# Altium PCB racer_pcb.PcbDoc (part 1 of 2)
Units mm, origin at the board's own origin, x right, y up, seen from the top; angles counter-clockwise.
Board outline 64 x 85 mm, 4 copper layers (Top Layer, Ground Plane, Power Plane, Bottom Layer), stack 0.844 mm thick; 108 components, 67 nets, 325 pads, 88 vias.
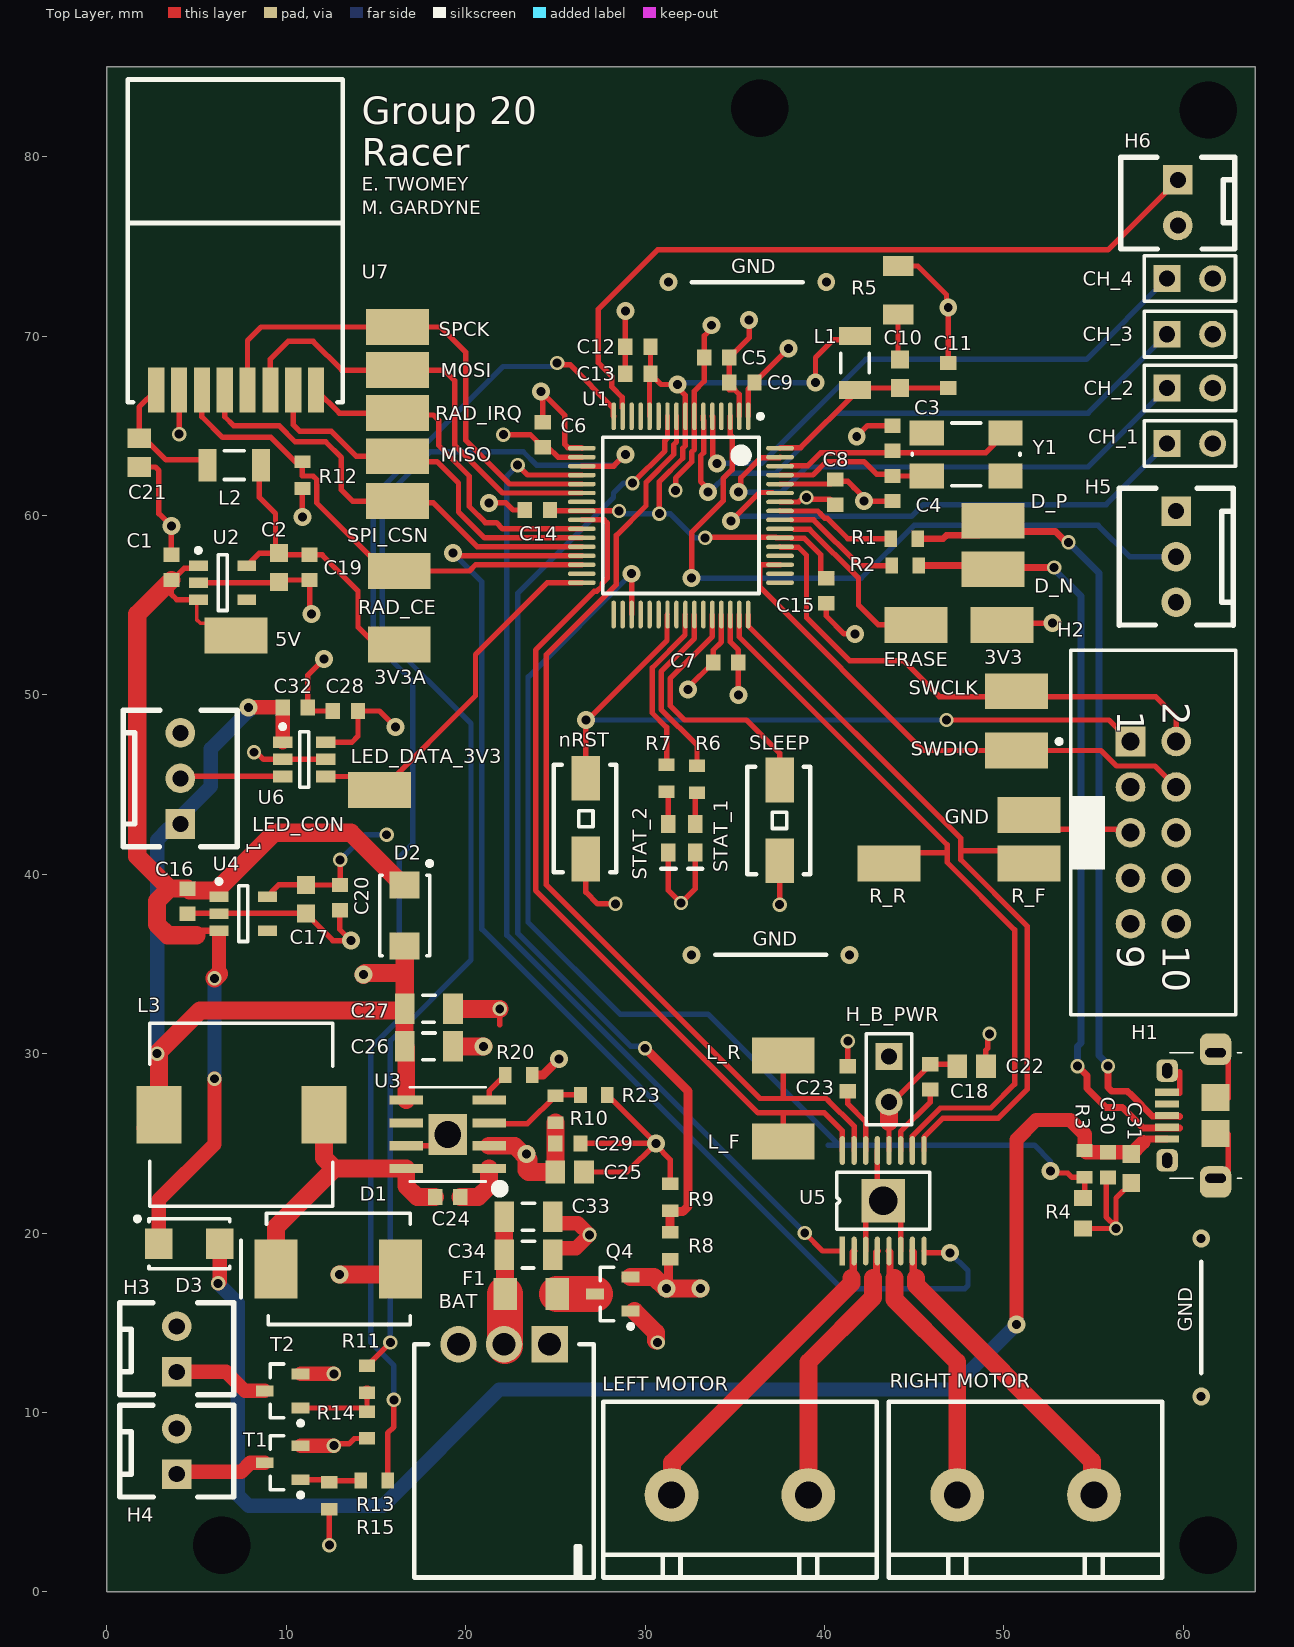
[diagram p0: Top Layer view]
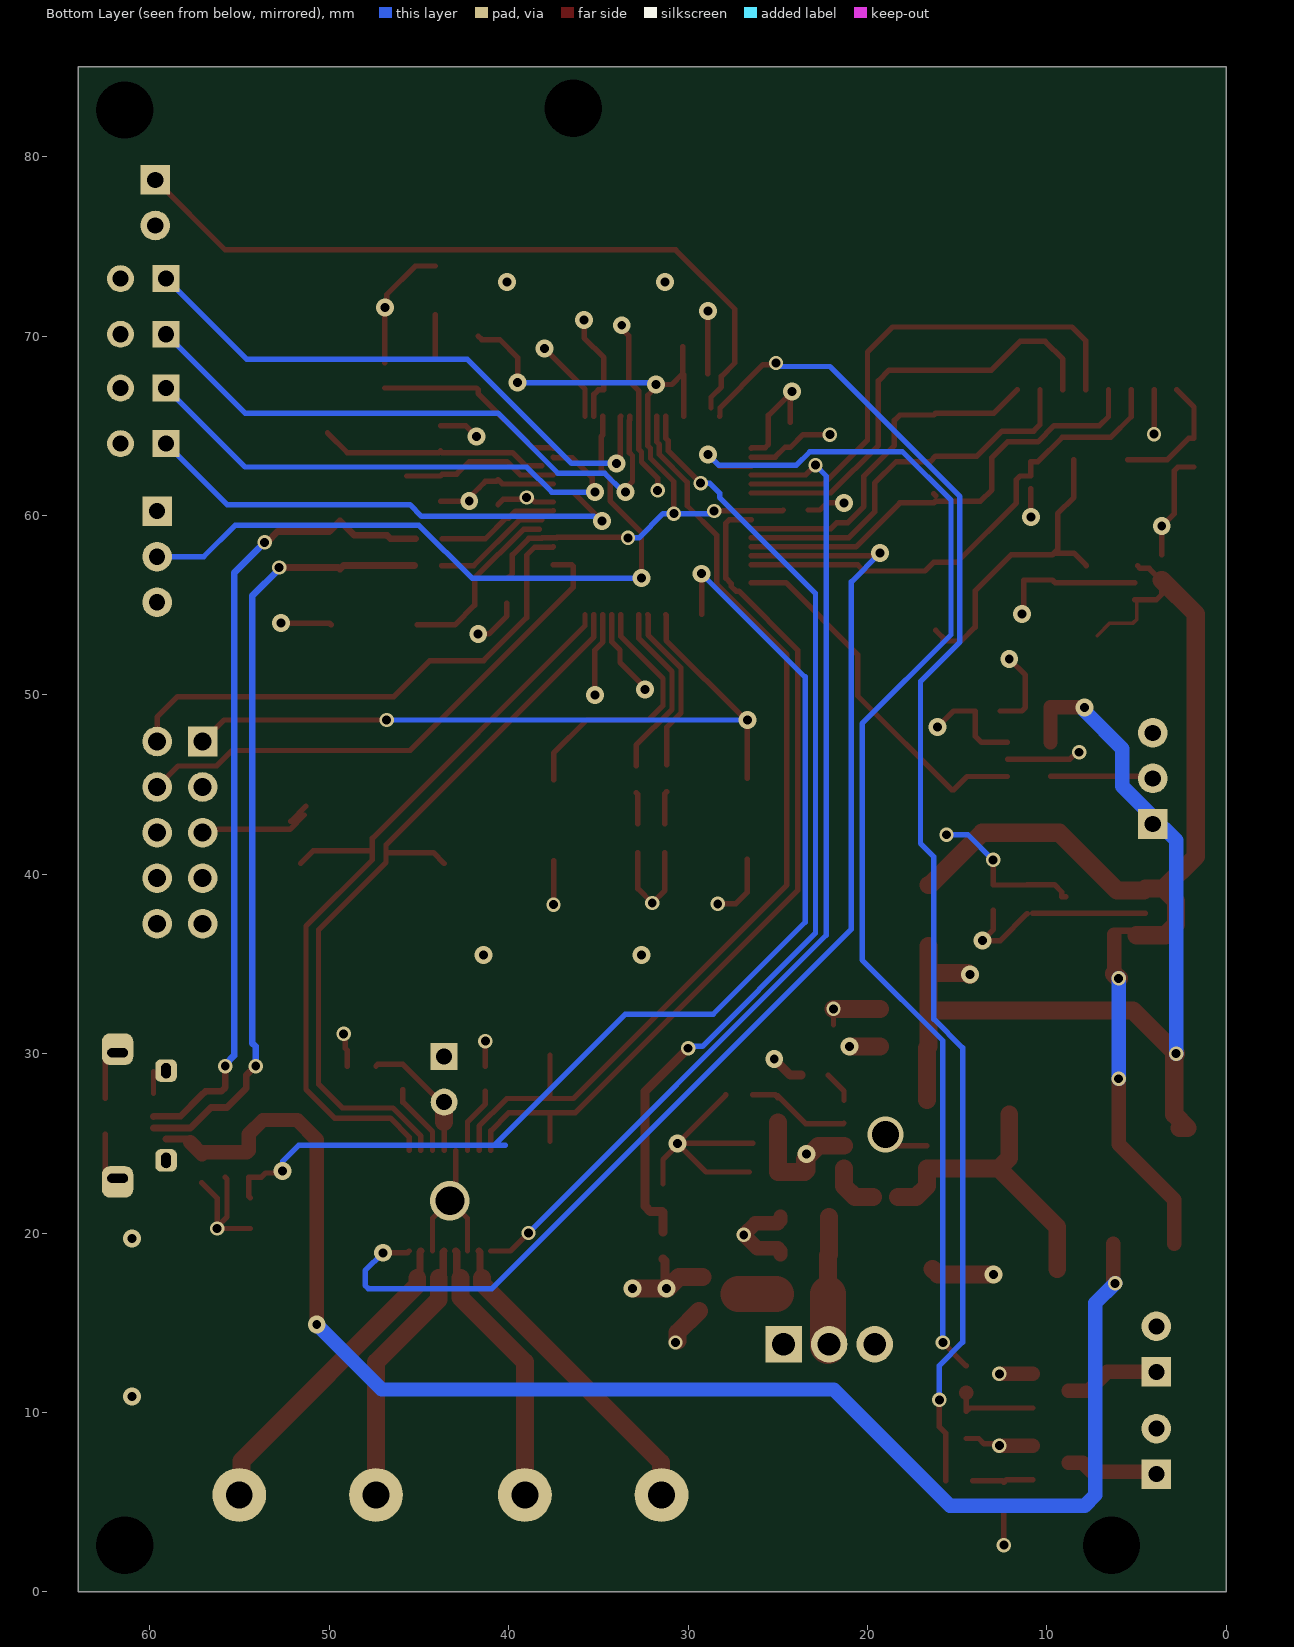
[diagram p1: Bottom Layer view, seen from below]
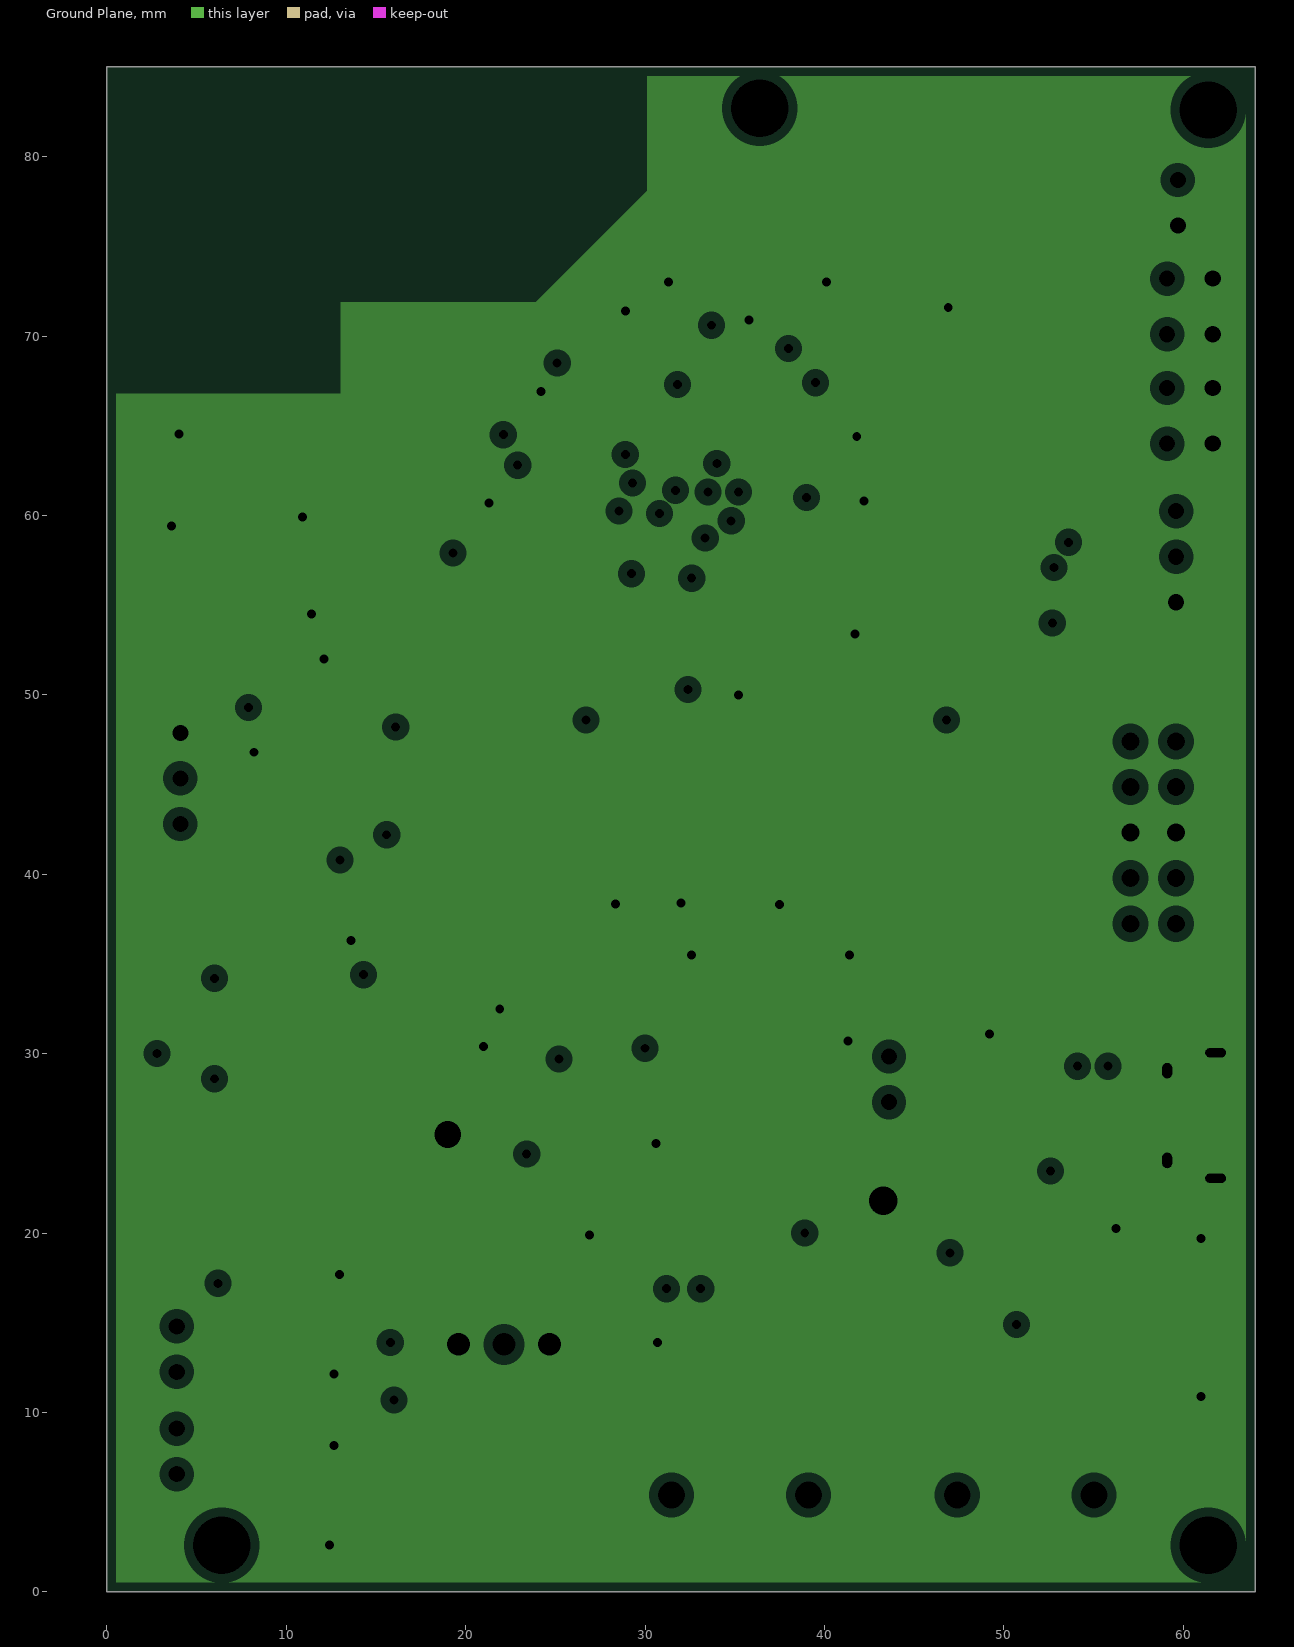
[diagram p2: Ground Plane, clearances drawn from the general rule]
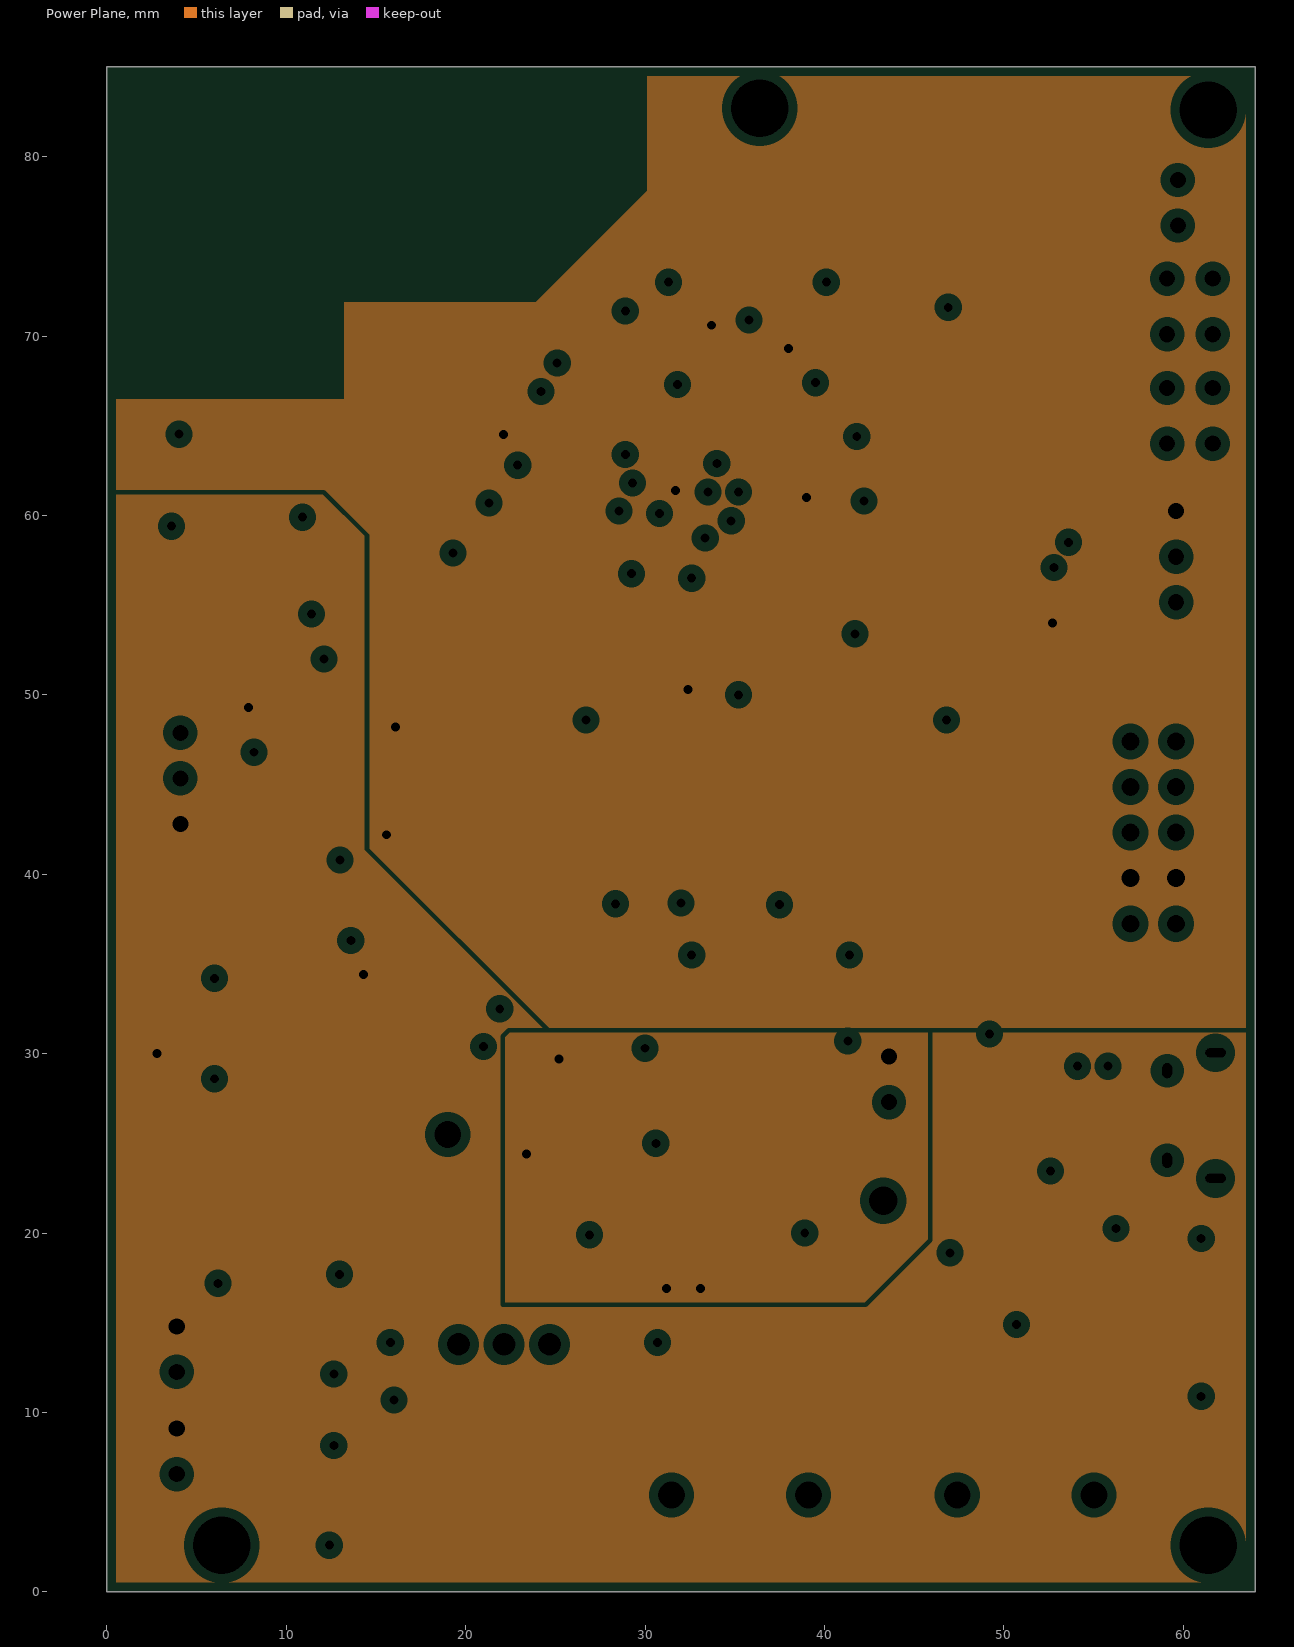
[diagram p3: Power Plane, clearances drawn from the general rule]

## Layer stack, top to bottom
Top Solder: solder mask 0.0102, Solder Resist, Dk 3.5
Top Layer: signal copper 0.0356
Dielectric 1: core 0.32, FR-4, Dk 4.8
Ground Plane: plane copper 0.036, net GND
Dielectric 3: prepreg 0.127, Dk 4.2
Power Plane: plane copper 0.036, net (Multiple Nets)
Dielectric 4: core 0.254, Dk 4.2
Bottom Layer: signal copper 0.0356
Bottom Solder: solder mask 0.0102, Solder Resist, Dk 3.5

## Board outline
0,85 64,85 64,0 0,0 0,85

## Design rules (kind name [scope] priority, off if disabled: settings)
BoardOutlineClearance [All] p1: gap=0.5 ignorepadtopadclearanceinfootprint=FALSE
Clearance GND_POLY [InNamedPolygon('GND')] p1: gap=0.254 ignorepadtopadclearanceinfootprint=FALSE
Clearance Min_Clearance_Circuit_Labs [All] p2: gap=0.2 ignorepadtopadclearanceinfootprint=FALSE
DiffPairsRouting [All] p1: maxlimit=0.254 minlimit=0.254 mostfreqgap=0.254 toplayer_minwidth=0.381 toplayer_maxwidth=0.381 toplayer_prefwidth=0.381 bottomlayer_minwidth=0.381 bottomlayer_maxwidth=0.381 bottomlayer_prefwidth=0.381 maxuncoupledlength=12.7
FanoutControl Fanout_BGA [IsBGA] p1 off: bgadir=Out bgaviamode=Centered fanoutstyle=Auto fanoutdirection=Alternating viagrid=0.025 // Fanout_BGA (Default Rule)
Height [All] p1: minheight=0 maxheight=50.8 prefheight=12.7
HoleSize [All] p1: absolutevalues=TRUE maxlimit=10 minlimit=0.3 maxpercent=80.000 minpercent=20.000
MinimumAnnularRing [All] p1: minimumring=0.1
MinimumSolderMaskSliver [All] p1: minsoldermaskwidth=0.102
NetAntennae [All] p1: netantennaetolerance=1
PlaneClearance [All] p1: clearance=0.508
PlaneConnect [All] p1: planeconnectstyle=Relief reliefexpansion=0.508 reliefentries=4 reliefconductorwidth=0.254 reliefairgap=0.254
PolygonConnect [All] p1: connectstyle=Relief reliefconductorwidth=0.305 reliefentries=4 polygonreliefangle="90 Angle" airgapwidth=0.254
RoutingVias [All] p1: holewidth=0.5 width=1 viastyle="Through Hole" minholewidth=0.3 minwidth=0.8 maxholewidth=1 maxwidth=2
SMDNeckDown [All] p1 off: percent=50.000
SMDToCorner [All] p1: distance=98425
SMDToPlane [All] p1: distance=1968504
SilkToSolderMaskClearance SilkscreenOverComponentPads [IsPad] p1: minsilkscreentomaskgap=0.2 clearancetoexposedcopper=TRUE
SolderMaskExpansion [All] p1: expansion=0.102 istentingtop=FALSE
ViasUnderSMD [All] p1: allowed=FALSE
Width [All] p1: maxlimit=2 minlimit=0.2 preferedwidth=0.3
21 further rules are at their usual default settings.

## Classes and differential pairs
differential pair D: +D_P -D_N

## Components (designator, comment, footprint, x,y, rotation, side; value= is the part's Value field where it differs from the comment)
3V3 "3V3" TP_1206 49.9,53.9 r0 top value=TP
3V3A "TP" TP_1206 16.3,52.8 r180 top
5V "TP" TP_1206 7.2,53.3 r180 top
BAT "Battery_HEADER_3pin" BATT_HEADER_3POS 22.14,13.8 r180 top
C1 "1uF" CAPC1608L 3.6,57.1 r270 top
C2 "4.7uF" CAPC1608N 9.6,57.1 r90 top
C3 "27pF" CAPC1608L 43.8,64.3 r270 top
C4 "27pF" CAPC1608L 43.8,61.5 r90 top
C5 "100nF" CAPC1608L 34,68.8 r180 top
C6 "100nF" CAPC1608L 24.3,64.5 r270 top
C7 "100nF" CAPC1608L 34.5,51.8 r180 top
C8 "100nF" CAPC1608L 40.6,61.3 r270 top
C9 "100nF" CAPC1608L 35.4,67.4 r0 top
C10 "4.7uF" CAPC1608N 44.2,67.9 r270 top
C11 "100nF" CAPC1608L 46.9,67.8 r270 top
C12 "100nF" CAPC1608L 29.6,69.4 r180 top
C13 "100nF" CAPC1608L 29.6,67.9 r180 top
C14 "100nF" CAPC1608L 24,60.3 r180 top
C15 "100nF" CAPC1608L 40.1,55.8 r270 top
C16 "1uF" CAPC1608L 4.5,38.5 r90 top
C17 "4.7uF" CAPC1608N 11.1,38.6 r90 top
C18 "10nF" CAPC1608L 45.9,28.7 r90 top
C19 "100nF" CAPC1608L 11.3,57.1 r90 top
C20 "100nF" CAPC1608L 13,38.7 r90 top
C21 "10uF" CAPC2012L 1.8,63.5 r90 top
C22 "10uF" CAPC2012L 48.2,29.3 r0 top
C23 "2.2uF" CAPC1608L 41.3,28.6 r90 top
C24 "100nF" CAPC1608L 19,22 r0 top
C25 "10uF" CAPC2012L 25.8,23.4 r180 top
C26 "22uF" CAPC3216L 17.95,30.4 r180 top
C27 "22uF" CAPC3216L 17.95,32.5 r180 top
C28 "100nF" CAPC1608L 13.3,49.1 r0 top
C29 "1uF" CAPC1608L 25.7,25 r180 top
C30 "100nF" CAPC1608L 55.8,23.8 r90 top
C31 "4.7uF" CAPC1608N 57.1,23.6 r90 top
C32 "100nF" CAPC1608L 10.5,49.3 r180 top
C33 "22uF" CAPC3216L 23.5,20.9 r180 top
C34 "22uF" CAPC3216L 23.5,18.8 r180 top
CH_1 "JA_PIN_Header 2" HDR1X2 59.1,64 r0 top
CH_2 "JA_PIN_Header 2" HDR1X2 59.1,67.1 r0 top
CH_3 "JA_PIN_Header 2" HDR1X2 59.1,70.1 r0 top
CH_4 "JA_PIN_Header 2" HDR1X2 59.1,73.2 r0 top
D1 "VS-30BQ015-M3/9AT" SMC 12.9,18 r180 top
D2 "SS14-E3/5AT" DIOM4227X23N 16.6,37.7 r270 top
D3 "SS14-E3/5AT" DIOM4227X23N 4.6,19.4 r0 top
D_N "TP" TP_1206 49.4,57 r180 top
D_P "TP" TP_1206 49.4,59.7 r0 top
ERASE "Erase" TP_1206 45.1,53.9 r0 top value=TP
F1 "5A" RESC3216N 23.65,16.6 r0 top
GND "TP" TP_1206 51.4,43.3 r0 top
H1 "JS_USB_MICRO_B" FCI_USB_10118194-0001LF 63.25,26.55 r90 top
H2 "Header 5X2 Vert" IDC2.54-V10D 58.33,42.32 r270 top
H3 "2 Pin Molex KK HDR" MOLEX_KK_2_HDR 3.9,12.26 r90 top
H4 "2 Pin Molex KK HDR" MOLEX_KK_2_HDR 3.9,6.56 r90 top
H5 "3 Pin Molex KK Hdr" MOLEX_KK_3_HDR 59.6,60.24 r270 top
H6 "2 Pin Molex KK HDR" MOLEX_KK_2_HDR 59.7,78.7 r270 top
H_B_PWR "JA_PIN_Header 2" HDR1X2 43.6,29.84 r270 top
L1 "1A max, Idc 0.3R," INDC3216L 41.7,68.5 r90 top
L2 "1A max, Idc 0.3R," INDC3216L 7.1,62.8 r180 top
L3 "IND 5.2UH 6A" INDUCTOR5u2 7.5,26.6 r180 top
L_F "TP" TP_1206 37.7,25.1 r180 top
L_R "TP" TP_1206 37.7,29.9 r180 top
LED_CON "3 Pin Molex KK Hdr" MOLEX_KK_3_HDR 4.1,42.8 r90 top
LED_DATA_3V3 "TP" TP_1206 15.2,44.7 r180 top
"LEFT MOTOR" "TERM_BLK_2POS" TERM_BLK_2POS 39.1,5.4 r180 top
MISO "TP" TP_1206 16.2,63.3 r180 top
MOSI "TP" TP_1206 16.2,68.1 r0 top
nRST "EVQPNF05M" EVQPNF05M 26.7,43.1 r90 top
Q4 "SSM3J328R,LF" SOT23_L 28.2,16.6 r180 top
R1 "27R" RESC1608L 44.45,58.7 r180 top
R2 "27R" RESC1608L 44.5,57.2 r180 top
R3 "27K" RESC1608L 54.5,23.85 r90 top
R4 "47K" RESC1608N 54.4,21.1 r270 top
R5 "1R" RESC3216L 44.1,72.55 r270 top
R6 "2K" RESC1608L 32.9,45.3 r90 top
R7 "3K" RESC1608L 31.2,45.35 r90 top
R8 "150K" RESC1608L 31.4,19.3 r270 top
R9 "100K" RESC1608L 31.4,22 r270 top
R10 "36K" RESC1608L 25,26.9 r270 top
R11 "2K" RESC1608L 14.5,11.85 r270 top
R12 "10K" RESC1608L 10.9,62.25 r90 top
R13 "2K" RESC1608L 14.9,6.2 r180 top
R14 "10K" RESC1608L 14.5,9.3 r270 top
R15 "10K" RESC1608L 12.4,5.35 r270 top
R20 "100K" RESC1608L 22.95,28.8 r0 top
R23 "10K" RESC1608L 27.15,27.7 r180 top
R_F "TP" TP_1206 51.4,40.6 r180 top
R_R "TP" TP_1206 43.6,40.6 r180 top
RAD_CE "TP" TP_1206 16.3,56.9 r180 top
RAD_IRQ "TP" TP_1206 16.2,65.7 r0 top
"RIGHT MOTOR" "TERM_BLK_2POS" TERM_BLK_2POS 55.02,5.4 r180 top
SLEEP "EVQPNF05M" EVQPNF05M 37.5,43 r90 top
SPCK "TP" TP_1206 16.2,70.5 r180 top
SPI_CSN "TP" TP_1206 16.2,60.8 r180 top
STAT_1 "Green" WL-SMCW0603 32.8,41.2 r90 top
STAT_2 "Red" WL-SMCW0603 31.3,41.2 r90 top
SWCLK "TP" TP_1206 50.7,50.2 r180 top
SWDIO "TP" TP_1206 50.7,46.9 r180 top
T1 "BSH105,215" SOT23_L 9.8,7.2 r180 top
T2 "BSH105,215" SOT23_L 9.8,11.2 r180 top
U1 "ATSAM4S8BA-ANR" LQFP64_L 32,60 r270 top locked
U2 "CAT6219-330TDGT3" SOT95P280X145-5N 6.45,56.25 r0 top
U3 "ADP2302ARDZ-5.0 BUCK" RD_8_1 19,25.5 r180 top locked value=Value
U4 "CAT6219-330TDGT3" SOT95P280X145-5N 7.6,37.8 r0 top
U5 "DRV8833" "HTSOP16 DRV8833" 41,19 r90 top locked
U6 "SN74LVC1T45" SOT23-6_N 11,46.4 r0 top
U7 "nRF24 SMD" NRF24 1.157,66.3 r0 top
Y1 "12MHz" 6.0X3.5-4 47.9,63.4 r0 top

## Footprints (in the part's own frame and the unit in brackets; to place one, negate y for a bottom-side part, rotate by r counter-clockwise, add the part's x,y. Pads: shape width x height; smd on the part's side, far side on the other; paste and mask are expansions set on the pad)
6.0X3.5-4 [mm] "4 SMD 6.0X3.5 mm No Lead Crystal"
  rect 1.9x1.4 smd: 1(-2.2,-1.2) 2(2.2,-1.2) 3(2.2,1.2) 4(-2.2,1.2)
  silkscreen extent -3,-1.75 3,1.75, body extent -3,-1.75 3,1.75, height 1.2
BATT_HEADER_3POS [mil]
  rect 80x80 hole 50: 1(-100,0)
  round 80 hole 50: 2(0,0) 3(100,0)
  silkscreen extent -197,0 197,512, body extent -197,-31 200,504, height 294
CAPC1608L [mm] "Chip Capacitor, Body 1.6x0.8mm, IPC High Density"
  rect 0.8x0.9 smd: 1(-0.7,0) 2(0.7,0)
  body extent -0.87,-0.48 0.87,0.48, height 0.85
CAPC1608N [mm] "Chip Capacitor, Body 1.6x0.8mm, IPC Medium Density"
  rect 1x1 smd: 1(-0.8,0) 2(0.8,0)
  body extent -0.87,-0.48 0.87,0.48, height 0.85
CAPC2012L [mm] "Chip Capacitor, Body 2.0x1.3mm, IPC High Density"
  rect 1.1x1.3 smd: 1(-0.8,0) 2(0.8,0)
  body extent -1.1,-0.72 1.1,0.72, height 1.1
CAPC3216L [mm] "Chip Capacitor, Body 3.2x1.6mm, IPC High Density"
  rect 1.1x1.7 smd: 1(-1.35,0) 2(1.35,0)
  silkscreen extent -0.35,-0.75 0.35,0.75, body extent -1.7,-0.9 1.7,0.9, height 1.35
DIOM4227X23N [mm] "Molded Diode, 2-Leads, Body 4.25x2.67mm, IPC Medium Density"
  rect 1.52x1.68 smd: 1(-1.7,0) 2(1.7,0)
  silkscreen extent -3.02,-1.4 2.25,1.52, body extent -2.25,-1.39 2.25,1.4, height 2.29
EVQPNF05M [mm] "Panansonic light touch SMD push button switch"
  rect 2.5x1.6 smd: 1(-2.25,0) 2(2.25,0)
  silkscreen extent -3,-1.7 3,1.8, body extent -3,-1.7 3,1.8, height 5
FCI_USB_10118194-0001LF [mm] "Micro USB B Type Receptacle"
  rect 0.4x1.35 smd mask+0.07: 1(-1.3,4.15) 2(-0.65,4.15) 3(0,4.15) 4(0.65,4.15) 5(1.3,4.15)
  rrect50% 1.75x1.75 hole 0.5 slot 1.15 at 90 deg copper offset -0.2,0 paste+0 mask+0.1: 6(-3.5,1.45)
  rrect50% 1.25x1.2 hole 0.55 slot 0.85 at 0 deg: 6(-2.5,4.15) 6(2.5,4.15)
  rect 1.5x1.55 smd: 6(-1,1.45) 6(1,1.45)
  rrect50% 1.75x1.75 hole 0.5 slot 1.15 at 90 deg copper offset 0.2,0 paste+0 mask+0.1: 6(3.5,1.45)
  silkscreen extent -3.5,0 3.5,4
HDR1X2 [mm] "Connector; Header; 2 Position"
  rect 1.5x1.5 hole 0.9: 1(0,0)
  round 1.5 hole 0.9: 2(2.54,0)
  silkscreen extent -1.27,-1.27 3.81,1.27, body extent -1.25,-1.25 3.79,1.25, height 8.54
"HTSOP16 DRV8833" [mm]
  rect 1.6x0.3 smd: 1(0,0)
  oval 1.6x0.3 smd: 2(0,-0.65) 3(0,-1.3) 4(0,-1.95) 5(0,-2.6) 6(0,-3.25) 7(0,-3.9) 8(0,-4.55) 9(5.6,-4.55) 10(5.6,-3.9) 11(5.6,-3.25) 12(5.6,-2.6) 13(5.6,-1.95) 14(5.6,-1.3) 15(5.6,-0.65) 16(5.6,0)
  rect 2.4x2.4 smd: 17(2.8,-2.275)
  silkscreen extent 1.2,-4.88 4.4,0.33, body extent -0.4,-4.77 6,0.23, height 1.13
IDC2.54-V10D [mm] "Connector; IDC, Low Profile Male Header, Thru-Hole; 10 Position; Vertical; Pitch 2.54 mm; Body 20.32 x 9.2 x 9.45 mm (LxWxH)"
  rect 1.65x1.65 hole 1: 1(-5.08,-1.27)
  round 1.65 hole 1: 2(-5.08,1.27) 3(-2.54,-1.27) 4(-2.54,1.27) 5(0,-1.27) 6(0,1.27) 7(2.54,-1.27) 8(2.54,1.27) 9(5.08,-1.27) 10(5.08,1.27)
  silkscreen extent -10.16,-5.37 10.16,4.6, body extent -10.16,-4.6 10.16,4.6, height 9.45
INDC3216L [mm] "Chip Inductor, Body 3.2x1.6mm, IPC High Density"
  rect 1x1.8 smd: 1(-1.5,0) 2(1.5,0)
  silkscreen extent -0.55,-0.8 0.55,0.8, body extent -1.75,-0.95 1.75,0.95, height 1.9
INDUCTOR5u2 [mm]
  rect 2.5x3.2 smd: 1(-4.6,0) 2(4.6,0)
  silkscreen extent -5.1,-5.1 5.1,5.1, body extent -5,-5 5,5, height 3.8
LQFP64_L [mm] "Thin QFP, 64-Leads, Body 10x10mm, Pitch 0.5mm, IPC High Density"
  oval 1.55x0.25 smd mask+0.07: 1(-5.525,3.75) 2(-5.525,3.25) 3(-5.525,2.75) 4(-5.525,2.25) 5(-5.525,1.75) 6(-5.525,1.25) 7(-5.525,0.75) 8(-5.525,0.25) 9(-5.525,-0.25) 10(-5.525,-0.75) 11(-5.525,-1.25) 12(-5.525,-1.75) 13(-5.525,-2.25) 14(-5.525,-2.75) 15(-5.525,-3.25) 16(-5.525,-3.75) 33(5.525,-3.75) 34(5.525,-3.25) 35(5.525,-2.75) 36(5.525,-2.25) 37(5.525,-1.75) 38(5.525,-1.25) 39(5.525,-0.75) 40(5.525,-0.25) 41(5.525,0.25) 42(5.525,0.75) 43(5.525,1.25) 44(5.525,1.75) 45(5.525,2.25) 46(5.525,2.75) 47(5.525,3.25) 48(5.525,3.75)
  oval 0.25x1.55 smd mask+0.07: 17(-3.75,-5.525) 18(-3.25,-5.525) 19(-2.75,-5.525) 20(-2.25,-5.525) 21(-1.75,-5.525) 22(-1.25,-5.525) 23(-0.75,-5.525) 24(-0.25,-5.525) 25(0.25,-5.525) 26(0.75,-5.525) 27(1.25,-5.525) 28(1.75,-5.525) 29(2.25,-5.525) 30(2.75,-5.525) 31(3.25,-5.525) 32(3.75,-5.525) 49(3.75,5.525) 50(3.25,5.525) 51(2.75,5.525) 52(2.25,5.525) 53(1.75,5.525) 54(1.25,5.525) 55(0.75,5.525) 56(0.25,5.525) 57(-0.25,5.525) 58(-0.75,5.525) 59(-1.25,5.525) 60(-1.75,5.525) 61(-2.25,5.525) 62(-2.75,5.525) 63(-3.25,5.525) 64(-3.75,5.525)
  silkscreen extent -5.65,-4.35 4.35,4.55, body extent -5,-5 5,5, height 1.6
MOLEX_KK_2_HDR [mil] "MOLEX_KK_2_HDR"
  rect 65x65 hole 35.43: 1(0,0)
  round 65 hole 35.43: 2(100,0)
  silkscreen extent -50,-125 152,125, body extent -42,-124 152,126, height 420
MOLEX_KK_3_HDR [mil] "MOLEX_KK_3_HDR"
  rect 65x65 hole 35.43: 1(0,0)
  round 65 hole 35.43: 2(100,0) 3(200,0)
  silkscreen extent -50,-125 250,125, body extent -50,-114 250,114, height 461
NRF24 [mm]
  rect 0.9x2.5 smd: 1(1.6,0.7) 2(2.871,0.7) 3(4.143,0.7) 4(5.414,0.7) 5(6.686,0.7) 6(7.957,0.7) 7(9.229,0.7) 8(10.5,0.7)
  silkscreen extent 0,0 12,18, body extent 0,0 12,18, height 2.27
RD_8_1 [mil]
  rect 74x20 smd paste+0 mask+0: 1(-91,75) 2(-91,25) 3(-91,-25) 4(-91,-75) 5(91,-75) 6(91,-25) 7(91,25) 8(91,75)
  rect 84.65x90 smd paste-44.5 mask+0: EPAD(0,0)
  silkscreen extent -118,-104 84,123, body extent 0,0 10,10, height 10
RESC1608L [mm] "Chip Resistor, Body 1.6x0.8mm, IPC High Density"
  rect 0.7x0.9 smd: 1(-0.75,0) 2(0.75,0)
  body extent -0.85,-0.48 0.85,0.48, height 0.9
RESC1608N [mm] "Chip Resistor, Body 1.6x0.8mm, IPC Medium Density"
  rect 0.9x1 smd: 1(-0.85,0) 2(0.85,0)
  body extent -0.85,-0.48 0.85,0.48, height 0.6
RESC3216L [mm] "Chip Resistor, Body 3.1x1.6mm, IPC High Density"
  rect 1.1x1.7 smd: 1(-1.35,0) 2(1.35,0)
  body extent -1.68,-0.87 1.68,0.87, height 2.54
RESC3216N [mm] "Chip Resistor, Body 3.2x1.6mm, IPC Medium Density"
  rect 1.3x1.8 smd: 1(-1.45,0) 2(1.45,0)
  body extent -1.68,-0.87 1.68,0.87, height 0.71
SMC [mm] "DO-214-AB/SMC; 2 C-Bend Leads; Body 7.9 x 5.9 mm, inc. leads (LxW)"
  rect 2.4x3.3 smd: 1(-3.475,0) 2(3.475,0)
  silkscreen extent -4,-3.1 5.43,3.1
SOT23-6_N [mm]
  rect 1.1x0.65 smd: 1(-1.2,0.95) 2(-1.2,0) 3(-1.2,-0.95) 4(1.2,-0.95) 5(1.2,0) 6(1.2,0.95)
  silkscreen extent -1.32,-1.55 0.25,1.95, body extent -0.9,-1.55 0.9,1.55, height 1.45
SOT23_L [mm] "SOT23, 3-Leads, Body 2.9x1.3mm, Pitch 0.95mm, Lead Span 2.3mm, IPC High Density"
  rect 1x0.6 smd: 1(-1,0.95) 2(-1,-0.95) 3(1,0)
  silkscreen extent -1.13,-1.5 0.7,1.92, body extent -0.7,-1.5 0.7,1.5, height 1.1
SOT95P280X145-5N [mm] "SOT23, 5-Leads, Body 2.90x2.80mm, Pitch 0.95mm, IPC Medium Density"
  rect 1.05x0.6 smd: 1(-1.35,0.95) 2(-1.35,0) 3(-1.35,-0.95) 4(1.35,-0.95) 5(1.35,0.95)
  silkscreen extent -1.47,-1.55 0.25,1.92, body extent -0.87,-1.52 0.87,1.53, height 1.45
TERM_BLK_2POS [mm]
  round 3 hole 1.5: 1(0,0) 2(7.62,0)
  silkscreen extent -3.81,-5.2 11.43,4.6
TP_1206 [mm] "Test Point Pad"
  rect 3.5x2 smd: 1(0,0)
  body extent -1.62,-0.85 1.63,0.8, height 2
WL-SMCW0603 [mm] "2.4 x 0.8 x 0.7mm LED"
  rect 1x0.8 smd: 1(0,0) 2(1.6,0)
  silkscreen extent -0.9,-0.4 -0.9,0.4

## Part data
3V3 3V3A 5V D_N D_P ERASE GND L_F L_R LED_DATA_3V3 MISO MOSI R_F R_R RAD_CE RAD_IRQ SPCK SPI_CSN SWCLK SWDIO: library part TP_1206, "Test-Point 3.3x1.6x2.1mm SMD", Manufacturer="Harwin Inc", Manufacturer Part Number=S1751-46R, Supplier Part Number 1=952-1478-2-ND, Mounting Type="Surface Mount", Storage Location=ProtoPlace, Supplier="ECE Dept", Supplier 1=Digi-Key, Supplier 2=Farnell, Supplier Part Number 2=1826282, Type="PC Test Point"
BAT: "3Pin Header 2.54mm spacing / Digikey #WM22663-ND", Supplier Part Number 1=WM22663-ND, Supplier 1=Digi-Key
C1 C16 C29: library part CC_1uF_0603, "CAP CER 1uF Y5V -20% +80% 16V 0603", Max Voltage=16V, Code_IPC="1608 [0603]", PackageReference=0603, Storage Location="PCB Assembly WS", Supplier="ECE Dept"
C2 C10 C17 C31: library part CC_4.7uF_0603, "CAP CER 4.7uF X5R +-20%  10V 0603", Max Voltage=10V, Code_IPC=2012[0805], Note="Footprint corresponds to dimensions for bulk cassette packaging. This case size has tightened tolerances.", PackageReference=0805, Storage Location="PCB Assembly WS", Supplier="ECE Dept"
C3 C4: library part CC_27pF_0603, "CAP CER 27pF NPO/COG +-5% 50V 0603", Code_IPC="1608 [0603]", PackageReference=0603, Storage Location="PCB Assembly WS", Supplier="ECE Dept"
C5 C6 C7 C8 C9 C11 C12 C13 C14 C15 C19 C20 C24 C28 C30 C32: library part CC_100nF_0603, "CAP CER 100nF X7R +-10% 50V 0603", Code_IPC="1608 [0603]", PackageReference=0603, Storage Location="PCB Assembly WS", Supplier="ECE Dept"
C18: library part CC_10nF_0603, "CAP CER 10nF X7R +-10% 50V 0603", Code_IPC="1608 [0603]", PackageReference=0603, Storage Location="PCB Assembly WS", Supplier="ECE Dept"
C21 C25: library part CC_10uF_0805_16V, "CAP CER 10uF X5R 16V 0805", Manufacturer="Samsung Electro-Mechanics", Manufacturer Part Number=CL21A106KOQNNWE, Max Voltage=16V, Operating Temperature="-55°C ~ 85°C", Package / Case="0805 (2012 Metric)", Ratings=-, Supplier Part Number 1=1276-2894-1-ND, Temperature Coefficient=X5R, Tolerance=±10%, Applications="General Purpose", Category=Capacitors, Code_IPC=2012[0805], ComponentLink1Description=http://www.samsungsem.com/kr/support/product-search/mlcc/CL21A106KOQNNWE.jsp, ComponentLink1URL=http://www.samsungsem.com/kr/support/product-search/mlcc/CL21A106KOQNNWE.jsp, Features=-, Height - Seated (Max)=-, Lead Spacing=-, Lead Style=-, Mounting Type="Surface Mount, MLCC", Note="Footprint corresponds to dimensions for bulk cassette packaging. This case size has tightened tolerances.", Notification="Current market demand for these product types have resulted in fluctuating and extending lead times. Lead times may differ.", PackageReference=0805, Packaging="Cut Tape (CT)", Part Status=Active, Pricing 1="1=0.35, 10=0.25, 100=0.1178, 500=0.08254, 1000=0.06831 (NZD)", RoHS="RoHS Compliant", Size / Dimension="0.079\" L x 0.049\" W (2.00mm x 1.25mm)", Stock 1=20000, Supplier 1=Digi-Key, Thickness (Max)="0.055\" (1.40mm)", Voltage - Rated=16V
C22: library part CC_10uF_0805_16V, "CAP CER 10uF X5R 16V 0805", Manufacturer="Samsung Electro-Mechanics", Manufacturer Part Number=CL21A106KOQNNWE, Operating Temperature="-55°C ~ 85°C", Package / Case="0805 (2012 Metric)", Ratings=-, Supplier Part Number 1=1276-2894-1-ND, Temperature Coefficient=X5R, Tolerance=±10%, Voltage - Rated=16V, Applications="General Purpose", Category=Capacitors, Code_IPC=2012[0805], ComponentLink1Description=http://www.samsungsem.com/kr/support/product-search/mlcc/CL21A106KOQNNWE.jsp, ComponentLink1URL=http://www.samsungsem.com/kr/support/product-search/mlcc/CL21A106KOQNNWE.jsp, Features=-, Height - Seated (Max)=-, Lead Spacing=-, Lead Style=-, Mounting Type="Surface Mount, MLCC", Note="Footprint corresponds to dimensions for bulk cassette packaging. This case size has tightened tolerances.", Notification="Current market demand for these product types have resulted in fluctuating and extending lead times. Lead times may differ.", PackageReference=0805, Packaging="Cut Tape (CT)", Part Status=Active, Pricing 1="1=0.35, 10=0.25, 100=0.1178, 500=0.08254, 1000=0.06831 (NZD)", RoHS="RoHS Compliant", Size / Dimension="0.079\" L x 0.049\" W (2.00mm x 1.25mm)", Stock 1=20000, Supplier 1=Digi-Key, Thickness (Max)="0.055\" (1.40mm)"
C23: library part CC_2.2uF_0603, "CAP CER 2.2uF X5R +-20% 10V 0603", Max Voltage=10V, Code_IPC="1608 [0603]", PackageReference=0603, Storage Location="PCB Assembly WS", Supplier="ECE Dept"
C26 C27 C33 C34: library part CC_22uF_1206, "CAP CER 22uF Y5V -20% +80% 10V 1206", Dielectric=Y5V, Max Voltage=10V, Storage Location="PCB Assembly WS", Supplier="ECE Dept"
CH_1 CH_2 CH_3 CH_4 H_B_PWR: "Header, 2-Pin", LatestRevisionDate=17-Jul-2002, LatestRevisionNote="Re-released for DXP Platform.", Publisher="Altium Limited"
D1: library part DS_VS-30BQ015-M3, "DIODE, SCHOTTKY, 3A, 15V, DO-214AB / SMC", Average Rectified Current=3A, Forward Voltage=350mV, Manufacturer="Vishay Semiconductors", Max Forward Surge Current (Ifsm)=650A, Max Reverse Voltage (DC)=15V, Peak Reverse Current=4mA, Supplier Part Number=VS-30BQ015-M3/9AT-ND, Supplier Part Number 1=VS-30BQ015-M3/9ATGIDKR-ND, ComponentLink1Description=https://datasheet.ciiva.com/36181/vs-30bq015-m3-9at-36181258.pdf, ComponentLink1URL=https://datasheet.ciiva.com/36181/vs-30bq015-m3-9at-36181258.pdf, Manufacturer Part Number=VS-30BQ015-M3/9AT, Supplier=Digi-Key, Supplier 1=Digi-Key, Supplier 2=Element14, Supplier Part Number 2=2628288
D2 D3: library part DS_SS14E3, "DIODE, SCHOTTKY, 1A, 40V, DO-214AC", Diode Case Style=DO-214, Forward Current If(AV)=1, Manufacturer="VISHAY GENERAL SEMICONDUCTOR", Package / Case=SMA, Supplier Part Number 1=SS14-E3/5ATGICT-ND, Diode Type=Schottky, Manufacturer Part Number=SS14-E3/5AT, Storage Location="PCB Assembly WS", Supplier="ECE Dept", Supplier 1=Digi-Key, Supplier 2=Farnell, Supplier 3=Mouser, Supplier Part Number 2=9551280, Supplier Part Number 3=625-SS14-E3/11T
F1: library part FS_Fuse_5.0A, "Fuse 5.0A Fast Acting 1206 SMD", Case/Package=1206, Case Code (Metric)=3216, DC Cold Resistance=19mR, Manufacturer="Bel TRP", Manufacturer Part Number=C1F5, Max Operating Temperature=125°C, Min Operating Temperature=-55°C, Supplier Part Number 1=507-1886-1-ND, Voltage Rating=125V, Voltage Rating (DC)=63V, Approvals=CE,cURus, Case Code (Imperial)=1206, ComponentLink1Description=http://www.farnell.com/datasheets/2571625.pdf, ComponentLink1URL=http://www.farnell.com/datasheets/2571625.pdf, ComponentLink2Description=http://belfuse.com/pdfs/C1F.pdf, ComponentLink2URL=http://belfuse.com/pdfs/C1F.pdf, ComponentLink3Description=http://www.mouser.com/ds/2/643/C1F-594910.pdf, ComponentLink3URL=http://www.mouser.com/ds/2/643/C1F-594910.pdf, ComponentLink4Description=https://belfuse.com/resources/StewartConnector/C1F.pdf, ComponentLink4URL=https://belfuse.com/resources/StewartConnector/C1F.pdf, Contact Plating=Nickel,Tin, Current Rating=5A, Fuse Type="Board Mount (Cartridge Style Excluded)", Length=0.126inch, Mount="Surface Mount", Number of Pins=2, Packaging="Tape and Reel", Pricing 1="1=0.32, 5=0.312, 10=0.298, 50=0.2662, 100=0.2479, 250=0.22032, 500=0.1836, 1000=0.17442 (USD)", Stock 1=725, Supplier 1=Digi-Key, Supplier 2=Element14, Supplier Part Number 2=2848595, Voltage Rating (AC)=125V, Width=0.062inch
H1: library part JS_USB_MICRO_B_SMT, "CONN USB MICRO B RECPT SMT R/A", Manufacturer=FCI, Manufacturer Part Number=10118194-0001LF, Supplier Part Number 1=609-4618-1-ND, Features="Shielded, Solder Retention", Gender=Receptacle, Mounting Type="Surface Mount, Right Angle, Horizontal", Number of Contacts=5, Specifications="USB 2.0", Supplier 1=Digi-Key
H2: library part JA_HDR_IDC_5X2_VERT, "IDC Header, 2,54mm, 10-Pin, Vert", Supplier Part Number 1=1096985, Storage Location="ECE Dept Store", Supplier="ECE Dept", Supplier 1=Farnell
H3 H4 H6: library part JA_MOLEX_KK_2POS, "CONN HEADER 2POS 2.54mm VERT_Thru Hole", Supplier Part Number 1=1462926, Storage Location="ECE Dept Store", Supplier="ECE Dept", Supplier 1=Farnell
H5: library part JA_MOLEX_KK_3POS, "CONN HEADER 3POS 2.54mm VERT_Thru Hole", Manufacturer=Molex, Manufacturer PN=22-23-2031, Supplier Part Number 1=9731156, Storage Location="ECE Dept Store", Supplier="ECE Dept", Supplier 1=Farnell
L1 L2: library part IN_Ferrite-Bead, "Ferrite Bead, Rdc 0.3R, Z100MHZ 600R, Imax 1A, SMD 1206", DC Current Rating=1, DC Resistance Max=0.08, Ferrite Case Style="1206 ^3216 Metric]", Frequency Range="50MHz to 1", Impedance Tolerance="± 25%", Manufacturer=FAIR-RITE, Manufacturer Part Number=2512066017Y1, Supplier Part Number 1=1612060, Ferrite Mounting=SMD, Impedance=600, Manufacturer PN=2512066017Y1, Storage Location="PCB Assembly WS", Supplier="ECE Dept", Supplier 1=Farnell
L3: library part CDRH104RNP-5R2NC, "FIXED IND 5.2UH 6A 22 MOHM SMD", Current - Saturation=5.6A, DC Resistance (DCR)="22 mOhm Max", Frequency - Self Resonant=-, Manufacturer="Sumida America Components Inc.", Operating Temperature="-40°C ~ 100°C", Package / Case=Nonstandard, Supplier Part Number 1=308-2280-1-ND, Tolerance=±30%, Category="Inductors, Coils, Chokes", ComponentLink1Description=http://products.sumida.com/products/pdf/CDRH104R.pdf, ComponentLink1URL=http://products.sumida.com/products/pdf/CDRH104R.pdf, Height - Seated (Max)="0.157\" (4.00mm)", Manufacturer Part Number=CDRH104RNP-5R2NC, Material - Core=Ferrite, Mounting Type="Surface Mount", Packaging="Cut Tape (CT)", Part Status=Active, Pricing 1="1=2.9, 10=2.678, 100=1.8743, 500=1.5173 (NZD)", Q @ Freq=-, Ratings=-, RoHS="RoHS Compliant", Shielding=Shielded, Size / Dimension="0.402\" L x 0.394\" W (10.20mm x 10.00mm)", Stock 1=3849, Supplier 1=Digi-Key, Supplier Device Package=-, Type=-
LED_CON: library part LED_Strip_Header, "CONN HEADER 3POS 2.54mm VERT_Thru Hole", Manufacturer=Molex, Manufacturer PN=22-23-2031, Supplier Part Number 1=9731156, Storage Location="ECE Dept Store", Supplier="ECE Dept", Supplier 1=Farnell
"LEFT MOTOR" "RIGHT MOTOR": "2 Position Terminal Block 7.62mm spacing"
nRST SLEEP: library part WS_EVQPNF05M, "Panasonic 6 x 3.5mm SMD Light Touch Switch Type SMD", Manufacturer=Panasonic, Supplier Part Number 1=2079481, Manufacturer PN=EVQPNF05M, PackageDescription="6.0 x 3.5 mm", Storage Location="PCB Assembly WS", Supplier="ECE Dept", Supplier 1=Farnell, Supplier 2=Digi-Key, Supplier Part Number 2=P13598SCT-ND
Q4: library part TM_SSM3J328R, "MOSFET P-CH 20V 6A SOT23-3", Case/Package=SOT-23-3, Continuous Drain Current (ID)=6A, Drain to Source Breakdown Voltage=-20V, Drain to Source Resistance=47.4mR, Drain to Source Voltage (Vdss)=20V, Gate to Source Voltage (Vgs)=8V, Input Capacitance=840pF, Input Capacitance (Ciss) @ Vds="840pF @ 10V", Manufacturer=Toshiba, Max Operating Temperature=150°C, Max Power Dissipation=1W, Min Operating Temperature=-55°C, Package / Case="SOT-23-3 Flat Leads", Package Quantity=3000, Power Dissipation=2W, Supplier Device Package=SOT-23F, Supplier Part Number=SSM3J328RLFDKR-ND, ComponentLink1Description=https://datasheet.ciiva.com/11158/ssm3j328r-datasheet-en-20140301-11158652.pdf, ComponentLink1URL=https://datasheet.ciiva.com/11158/ssm3j328r-datasheet-en-20140301-11158652.pdf, Current - Continuous Drain (Id) @ 25° C=6A, Element Configuration=Single, FET Feature="Logic Level Gate, 1.5V Drive", FET Type="MOSFET P-Channel, Metal Oxide", Gate Charge (Qg) @ Vgs="12.8nC @ 4.5V", Manufacturer Part Number=SSM3J328R,LF, Mount="Surface Mount", Number of Channels=1, Number of Elements=1, Number of Pins=3, Packaging="Tape and Reel", Power - Max=1W, Pricing="1=0.79, 10=0.658, 25=0.5772, 100=0.4939, 250=0.42836, 500=0.36284, 1000=0.27972 (NZD)", Radiation Hardening=No, Rds On Max=29.8mR, Storage Location="PCB Assembly WS", Supplier=Digi-Key, Supplier 1=Digi-Key, Supplier Part Number 1=SSM3J328RLFDKR-ND, Turn-Off Delay Time=107ns, Turn-On Delay Time=32ns, Vgs(th) (Max) @ Id="1V @ 1mA"
R1 R2: library part RS_27R, "RES 27 OHM 1/10W 5% 0603 SMD", Storage Location="PCB Assembly WS", Supplier="ECE Dept"
R3: library part RS_27K, "RES 27K OHM 1/10W 5% 0603 SMD", Storage Location="PCB Assembly WS", Supplier="ECE Dept"
R4: library part RS_47K, "RES 47.0K OHM 1/10W 5% 0603 SMD", Storage Location="PCB Assembly WS", Supplier="ECE Dept"
R5: library part RT_1R, "RES 1R OHM 1/4W 5% 1206 SMD", Storage Location="PCB Assembly WS", Supplier="ECE Dept"
R6 R11 R13: library part RS_2K, "RES 2K OHM 1/10W 5% 0603 SMD", Storage Location="PCB Assembly WS", Supplier="ECE Dept"
R7: library part RS_3K, "RES 3K OHM 1/10W 5% 0603 SMD", Storage Location="PCB Assembly WS", Supplier="ECE Dept"
R8: library part RS_150K, "RES 150K OHM 1/10W 5% 0603 SMD", Storage Location="PCB Assembly WS", Supplier="ECE Dept"
R9 R20: library part RS_100K, "RES 100K OHM 1/10W 5% 0603 SMD", Storage Location="PCB Assembly WS", Supplier="ECE Dept"
R10: library part RS_36K, "RES 36K OHM 1/10W 5% 0603 SMD", Storage Location="PCB Assembly WS", Supplier="ECE Dept"
R12 R14 R15 R23: library part RS_10K, "RES 10.0K OHM 1/10W 5% 0603 SMD", Storage Location="PCB Assembly WS", Supplier="ECE Dept"
STAT_1: library part DL_150060GS75000, "LED Green 430mcd 0603 SMD", Forward Current If=30, Forward Voltage=3.2, Manufacturer="WURTH ELEKTRONIK", Manufacturer Part Number=150060GS75000, Supplier Part Number 1=2322070, LED Colour=Green, LED Mounting=SMD, Lens Shape=Rectangular, Luminous Intensity=430, Storage Location="PCB Assembly WS", Supplier="ECE Dept", Supplier 1=Farnell, Viewing Angle=140°, Wavelength Typ=520
STAT_2: library part DL_150060RS75000, "LED Red 250mcd 0603 SMD", Forward Current If=30, Forward Voltage=2, Manufacturer="WURTH ELEKTRONIK", Manufacturer Part Number=150060RS75000, Supplier Part Number 1=2322071, LED Colour=Red, LED Mounting=SMD, Lens Shape=Rectangular, Luminous Intensity=250, Storage Location="PCB Assembly WS", Supplier="ECE Dept", Supplier 1=Farnell, Viewing Angle=140°, Wavelength Typ=625
T1 T2: library part TM_BSH105, "MOSFET N-CH 20V 1.05A SOT-23", Current - Continuous Drain (Id) @ 25° C=1.05A, Drain to Source Voltage (Vdss)=20V, Input Capacitance (Ciss) @ Vds="152pF @ 16V", Manufacturer="NXP Semiconductors", Package / Case="TO-236-3, SC-59, SOT-23-3", Power - Max=417mW, Supplier Part Number 1=1758066, FET Type="MOSFET N-Channel, Metal Oxide", Gate Charge (Qg) @ Vgs="3.9nC @ 4.5V", Manufacturer Part Number=BSH105,215, Pricing="1=0.53, 10=0.42, 25=0.3544, 100=0.2885, 250=0.23896, 500=0.1974, 1000=0.14785 (NZD)", Rds On (Max) @ Id, Vgs="200 mOhm @ 600mA, 4.5V", Storage Location="PCB Assembly WS", Supplier="ECE Dept", Supplier 1=Farnell, Supplier 2=Digi-Key, Supplier Part Number 2=568-6215-1-ND
U1: library part SE_ATSAM4S16BA-MU, "IC MCU 32BIT 512KB FLASH 64LQFP", Manufacturer=Atmel, Package / Case=64-LQFP, Supplier Part Number 1=ATSAM4S8BA-ANRCT-ND, Voltage - Supply (Vcc/Vdd)="1.62 V ~ 3.6 V", Code_JEDEC=MO-220VMMD-3, ComponentLink1Description="Manufacturer URL", ComponentLink1URL=http://www.atmel.com/, ComponentLink2Description="SAM4S Series Datasheet", ComponentLink2URL=http://www.atmel.com/dyn/resources/prod_documents/11100.pdf, ComponentLink3Description="SAM4S Series Summary", ComponentLink3URL=http://www.atmel.com/dyn/resources/prod_documents/11100S.pdf, Connectivity="I²C, IrDA, Memory Card, SPI, SSC, UART/USART, USB", Core Processor="ARM® Cortex®-M4", Core Size=32-Bit, Data Converters="A/D 11x12b, D/A 2x12b", Manufacturer Part Number=ATSAM4S8BA-ANR, Number of I/O=47, PackageDescription="64-Pin Quad Flat No-Lead (QFN) Sawn, 9 x 9 x 1.0 mm Body, 0.5 mm Pitch, Exposed Pad", PackageReference=64PS, PackageVersion="revJ, Jul-2007", Packaging="Cut Tape (CT)", Peripherals="Brown-out Detect/Reset, DMA, POR, PWM, WDT", Program Memory Size="512KB (512K x 8)", Program Memory Type=FLASH, RAM Size="128K x 8", Speed=120MHz, Supplier 1=Digi-Key
U2 U4: library part SV_CAT6219-330TDGT3, "IC REG LIN 3.3V 500MA TSOT23-5", Base Part Number=CAT6219, Current - Output=500mA, Package / Case="SOT-23-5 Thin, TSOT-23-5", Supplier Device Package=TSOT-23-5, Supplier Part Number=CAT6219-330TDGT3CT-ND, Voltage - Input (Max)=5.5V, Voltage - Output (Min/Fixed)=3.3V, Voltage Dropout (Max)="0.5V @ 500mA", ComponentLink1Description=http://www.onsemi.com/pub/Collateral/CAT6219-D.PDF, ComponentLink1URL=http://www.onsemi.com/pub/Collateral/CAT6219-D.PDF, Manufacturer Part Number=CAT6219-330TDGT3, Supplier=Digi-Key, Supplier 1=Digi-Key
U3: library part ADP2302ARDZ-5.0-R7, "IC REG BUCK 5V 2A 8SOIC", Current - Output=2A, Frequency - Switching=700kHz, Supplier Part Number 1=ADP2302ARDZ-5.0-R7CT-ND, Voltage - Input (Max)=20V, Voltage - Output (Min/Fixed)=5V, Manufacturer_Part_Number=ADP2302ARDZ-5.0-R7, Output Type=Fixed, Supplier 1=Digi-Key, Type=DEV, Vendor="Analog Devices Inc"
U5: "Dual H-Bridge Motor Driver 1.5A"
U6: "1.8V - 5V level converter"
U7: library part NRF24, "nRF24 SMD Module", Warning="No power planes near or under device"
Y1: library part XT_CRYSTAL_12MHz_18pF, "CRYSTAL 12MHZ 18PF 6X3.5mm SMD", ESR (Equivalent Series Resistance)="60 Ohm", Frequency Stability=±50ppm, Frequency Tolerance=±30ppm, Load Capacitance=18pF, Manufacturer="CTS-Frequency Controls", Manufacturer Part Number=406C35D12M00000, Operating Mode=Fundamental, Operating Temperature="-20°C ~ 70°C", Package / Case="4-SMD, No Lead (DFN, LCC)", Supplier Part Number 1=CTX855CT-ND, Frequency=12MHz, Height="0.047\" (1.20mm)", Mounting Type="Surface Mount", Size / Dimension="0.236\" L x 0.138\" W (6.00mm x 3.50mm)", Supplier 1=Digi-Key

## Free pads (board coordinates)
  round 1.524 hole 3.2: 2(6.4,2.6) 2(36.4,82.7) 2(61.4,2.6) 2(61.4,82.6)

## Via types
v1: diameter 1, hole 0.5, Top Layer to Bottom Layer, 48 vias
v2: diameter 0.8, hole 0.5, Top Layer to Bottom Layer, 37 vias
v3: diameter 0.8, hole 0.5, Top Layer to Bottom Layer, tented top, 1 vias
v4: diameter 2.2, hole 1.6, Top Layer to Bottom Layer, 1 vias
v5: diameter 2, hole 1.5, Top Layer to Bottom Layer, 1 vias

## Nets (pads, with @x,y where several pads share a name; then routed paths per layer and width w, separated by ;. In a path a pad name is that pad's centre, name@x,y a point inside that pad or via, vN(x,y) a via of type N, cw(c..) or ccw(c..) an arc to the next point about the centre after c; other vN are vias at no path point)
3V3A: 3V3A.1 C2.2 C19.2 L2.1 U2.5 | length 18
  Top Layer w0.3: U2.5 8.5,57.9 C2.2 ; L2.1@8.5,63.1 8.5,61 9.4,60.1 9.4,58.1 C2.2 ; 3V3A.1@15.6,53 3V3A.1@16.2,53.6 ; 3V3A.1@15.8,53 14.776,53 14,53.776 14,55.8 12,57.8 C19.2 9.7,57.8 C2.2
3V3D: 3V3.1 C5.2 C6.2 C7.2 C8.2 C9.2 C17.2 C20.2 C28.2 H2.7 H2.8 H5.1 U1.1 U1.7 U1.18 U1.45 U1.58 U4.5 U6.6 | length 45.7
  Top Layer w0.3: U4.5 9.175,38.75 9.175,39.011 9.583,39.419 C17.2@10.781,39.419 ; C17.2@10.819,39.419 C17.2@11.1,39.419 ; C17.2 C20.2 v2(13,40.8) ; U6.6 13.65,47.35 14,47.7 C28.2 15.2,49.1 v1(16.1,48.2) ; v2(22.1,64.5) 23.6,64.5 C6.2 24.6,63.8 25.15,63.25 U1.18 ; v3(31.7,61.4) 31.7,62.079 32.6,62.979 32.6,63.532 32.75,63.682 32.75,64.49 U1.7 32.75,66.937 33.3,67.487 C5.2 33.3,70.011 33.7,70.411 v1(33.7,70.6) ; v1(32.4,50.3) 32.4,50.4 C7.2 33.8,52.5 34.25,52.95 U1.45 ; U1.1 35.75,67.05 C9.2 v1(38,69.3) ; U1.58 38.56,60.75 38.81,61 v2(39,61) 39.096,60.904 40.296,60.904 C8.2 ; 3V3.1 50,54 v1(52.7,54)
  Bottom Layer w0.3: v2(13,40.8) 14.4,42.2 v2(15.6,42.2) ; v2(39,61) v2@39.1,61
5V_LP: 5V.1 C1.2 C16.2 D2.1 D3.1 U2.1 U2.3 U4.1 U4.3 | length 67
  Top Layer w0.2: U2.3 5,55.2 5,54.2 5.2,54 6.5,54 5V.1
  Top Layer w0.3: U2.1@4.95,57.2 4.8,57.05 4.3,57.05 3.65,56.4 C1.2 3.6,55.6 3.9,55.3 U2.3
  Top Layer w0.381: 5,36.6 5.25,36.85 U4.3
  Top Layer w0.8: D3.1 2.9,21.855 6,24.955 v2(6,28.6) ; v2@6.25,34.45 U4.3@6.25,36.642
  Top Layer w1.016: C1.2 1.7,54.5 1.7,41 3.5,39.2 ; 5,36.6 3.395,36.6 2.8,37.195 2.8,38.5 3.5,39.2 ; v2(6,34.2) v2@6.25,34.45 ; D2.1 16.52,39.4 13.612,42.308 9.308,42.308 6.1,39.1 4.6,39.1 C16.2 3.5,39.2
  Bottom Layer w0.8: v2(6,28.6) v2(6,34.2)
5V_REG: C26.2 C27.2 C32.2 D2.2 H3.2 H4.2 L3.2 LED_CON.1 U3.5 U6.1 | length 54.8
  Top Layer w0.3: LED_CON.1@4.04,42.74 LED_CON.1 LED_CON.1@4.06,42.84 ; C26.2 C26.2@16.689,30.311
  Top Layer w0.8: v1(7.9,49.3) C32.2 ; U6.1 C32.2@9.8,49.1
  Top Layer w1: C26.2 C27.2 ; U3.5 C26.2@16.689,30.311
  Top Layer w1.016: L3.2@2.6,25.858 2.158,25.858 L3.2 2.9,29.9 v2(2.8,30) 5.2,32.4 16.5,32.4 C27.2 16.6,34.5 ; v1(14.3,34.4) 14.4,34.5 16.6,34.5 ; D2.2 16.6,34.5
  Bottom Layer w0.8: v2(2.8,30) 2.8,41.9 LED_CON.1@3.43,42.53 ; LED_CON.1@4.1,43.2 5.8,44.9 5.8,47 v1@7.9,49.1
6V: C25.2 C29.2 H_B_PWR.1 Q4.2 R8.2 R10.2 R20.2 U3.2 | length 17.3
  Top Layer w0.5: R20.2 24.3,28.8 v1(25.2,29.7) ; v1@31.156,16.9 31.3,17.044 31.3,18.45 R8.2
  Top Layer w0.8: 23.4,23.4 v1(23.4,24.4)
  Top Layer w1: U3.2 22.735,24.865 23.5,24.1 23.5,23.4 ; v1(23.4,24.4) 23.4,23.5 23.5,23.4 ; R10.2 C29.2 C25.2 23.5,23.4 ; Q4.2 30.506,17.55 v1@31.156,16.9 ; v1(31.2,16.9) v1(33.1,16.9)
  Bottom Layer w0.3: v1(25.2,29.7) v1@25.3,29.7
BAT_DIV: R8.1 R9.2 U1.10 | length 54.4
  Top Layer w0.3: v2(29.3,61.8) 31.1,63.6 31.1,64.153 31.25,64.303 U1.10
  Top Layer w0.5: v2(30,30.3) 32.4,27.9 32.4,21.5 32.1,21.2 31.45,21.2 31.4,21.15 R8.1
  Bottom Layer w0.3: v2(29.3,61.8) 28.8,61.8 28.239,61.239 28.239,61 22.9,55.661 22.9,36.714 29.207,30.407 29.893,30.407 v2(30,30.3)
BUMPER_SWITCH: H6.1 U1.15 | length 41.3
  Top Layer w0.3: U1.15@28.725,66 28.725,66.587 28.15,67.162 28.15,67.75 27.4,68.5 27.4,71.5 30.7,74.8 55.8,74.8 H6.1
CH1_SEL: CH_1.1 U1.59 | length 29
  Top Layer w0.3: v1(34.8,59.698) 36.377,61.275 U1.59@37.1,61.275
  Bottom Layer w0.3: v1(34.8,59.698) 34.998,59.698 35.25,59.95 44.85,59.95 45.5,60.6 55.7,60.6 CH_1.1
CH2_SEL: CH_2.1 U1.63 | length 29.8
  Top Layer w0.3: v1(35.2,61.3) 35.334,61.434 35.334,62.098 36.461,63.225 37.5,63.225 U1.63
  Bottom Layer w0.3: v1(35.2,61.3) 37.6,61.3 39,62.7 54.7,62.7 CH_2.1
CH3_SEL: CH_3.1 U1.6 | length 33.7
  Top Layer w0.3: U1.6 33.25,65.318 33.275,65.293 33.275,63.5 33.1,63.325 33.1,61.9 33.5,61.5 v1(33.5,61.3)
  Bottom Layer w0.3: v1(33.5,61.3) 33.602,61.3 34.652,62.35 37.257,62.35 40.607,65.7 54.7,65.7 CH_3.1
CH4_SEL: CH_4.1 U1.5 | length 32.1
  Top Layer w0.3: U1.5 33.775,65.5 33.775,63.314 34,63.089 v1(34,62.9)
  Bottom Layer w0.3: v1(34,62.9) 36.5,62.9 42.3,68.7 54.6,68.7 CH_4.1
D_N: D_N.1 H1.2 R2.1 | length 43.8
  Top Layer w0.381: R2.1 49.2,57.2 D_N.1 49.5,57.1 52.7,57.1 v2@52.8,57 ; v2(54.1,29.3) 54.107,29.3 54.632,28.774 54.632,28.068 55.7,27 56.6,27 57.75,25.85 59.8,25.85
  Bottom Layer w0.381: v2(52.8,57.1) 52.8,57 54.3,55.5 54.3,30.6 54.1,30.4 v2(54.1,29.3)
D_P: D_P.1 H1.3 R1.1 | length 45.3
  Top Layer w0.381: R1.1 46.6,58.7 46.791,58.89 48.59,58.89 D_P.1 50,59.1 52.887,59.1 53.487,58.5 v2(53.6,58.5) ; v2(55.8,29.3) 55.8,28.123 56.023,27.9 56.9,27.9 57.115,27.685 58.291,26.509 59.791,26.509 59.8,26.5
  Bottom Layer w0.381: v2(53.6,58.5) 55.3,56.8 55.3,29.9 55.8,29.4 v2(55.8,29.3)
DARSTEDLY_IN_1: H5.2 U1.3 | length 38.9
  Top Layer w0.3: v1(32.6,56.5) 32.6,59.061 34.35,60.811 34.35,62.048 34.85,62.548 34.85,64.39 34.75,64.49 U1.3
  Bottom Layer w0.3: v1(32.6,56.5) 42.05,56.5 45,59.45 55.25,59.45 57,57.7 H5.2
DARSTEDLY_OUT_1: R13.1 U1.16 | length 75.4
  Top Layer w0.3: R13.1 15.65,8.85 16,9.2 v2(16,10.7) ; v2(25.1,68.5) 25.196,68.404 25.819,68.404 28.225,65.998 28.225,65.55 U1.16
  Bottom Layer w0.3: v2(16,10.7) 16,12.618 14.7,13.918 14.7,30.326 16.3,31.926 16.3,40.964 17.05,41.714 17.05,50.752 14.85,52.952 14.85,61.057 22.093,68.3 24.924,68.3 25.1,68.476 v2(25.1,68.5)
DARSTEDLY_OUT_2: R11.1 U1.19 | length 70.6
  Top Layer w0.3: R11.1 v2(15.8,13.9) ; U1.19 28.25,62.75 v1(28.9,63.4)
  Bottom Layer w0.3: v2(15.8,13.9) 15.8,30.719 20.3,35.219 20.3,48.4 15.35,53.35 15.35,60.85 18.05,63.55 23.211,63.55 23.961,62.8 28.3,62.8 v1(28.9,63.4)
GND: BAT.1 BAT.3 C1.1 C2.1 C3.1 C4.1 C5.1 C6.1 C7.1 C8.1 C9.1 C11.1 C12.2 C13.2 C14.2 C15.2 C16.1 C17.1 C19.1 C20.1 C21.1 C22.2 C23.2 C25.1 C26.1 C27.1 C28.1 C29.1 C30.1 C31.1 C32.1 C33.1 C34.1 CH_1.2 CH_2.2 CH_3.2 CH_4.2 D1.1 GND.1 H1.5 H1.6 H2.5 H2.6 H5.3 H6.2 LED_CON.3 nRST.1 Q4.1 R4.2 R5.1 R9.1 R12.1 R14.2 R15.2 R23.1 SLEEP.1 STAT_1.1 STAT_2.1 T1.2 T2.2 U1.2 U1.17 U1.46 U1.60 U2.2 U3.7 U3.EPAD U4.2 U5.3 U5.6 U5.13 U5.17 U6.2 U6.5 U7.2 | length 169.3
  Top Layer w0.3: C21.1 2.7,62.7 2.9,62.5 2.9,60.1 v1(3.6,59.4) C1.1 ; v2(4.029,64.529) U7.2 ; C16.1@4.519,37.819 U4.2@6.231,37.819 ; U2.2 9.55,56.25 C2.1 9.7,56.4 C19.1 11.3,54.6 v1(11.4,54.5) ; U4.2@6.269,37.819 C17.1@10.781,37.819 ; v2(8.2,46.8) 8.335,46.8 8.735,46.4 U6.2 U6.5 ; v1(10.9,59.9) R12.1 ; C17.1 12.6,36.3 v1(13.6,36.3) 12.983,36.917 C20.1@12.983,37.983 ; v1(12.1,52) 11.2,51.1 C32.1 11.4,49.1 C28.1 ; v2(12.4,2.6) R15.2 ; v2(12.65,8.15) 12.746,8.246 13.496,8.246 13.8,8.55 R14.2 ; U3.7 18.365,24.865 v5(19,25.5) ; v1(21.3,60.7) 22.25,60.7 22.65,60.3 C14.2 ; 21.9,31.6 v2(21.9,32.5) ; v1(24.2,66.9) v1@24.3,66.8 ; C6.1 v1@24.3,66.8 ; C29.1 v1(30.6,25) ; U1.17 26.45,63.775 25.701,63.775 25.525,63.951 25.525,65.575 v1@24.3,66.8 ; C25.1 29,23.4 v1(30.6,25) ; nRST.1 26.7,39 27.348,38.352 v2(28.348,38.352) ; R23.1 v1(30.6,25) ; C13.2 C12.2 v1(28.9,71.4) ; Q4.1 Q4.1@29.4,15.65 ; v2@30.604,13.996 v2(30.7,13.9) v2@30.7,14.15 ; STAT_2.1 31.3,39.1 v2(32,38.4) 32.8,39.2 STAT_1.1 ; R9.1 31.4,24.1 30.6,24.9 v1(30.6,25) ; U1.46 34.75,52.95 35.2,52.5 C7.1 v1(35.2,50) ; U1.2 35.25,66.75 35,67 34.7,67 C9.1 C5.1 35.8,69.9 v1(35.8,70.9) ; v2(37.5,38.3) SLEEP.1 ; U1.60 40.35,61.75 C8.1 40.7,61.9 41.3,61.9 41.642,61.558 41.642,61.548 42.2,60.989 v1(42.2,60.8) C4.1 ; C15.2 40.1,54.4 41.1,53.4 v1(41.7,53.4) ; C23.2 v2(41.3,30.7) ; v1(41.8,64.4) 42.4,65 C3.1 ; U5.3 42.3,20.825 v4(43.275,21.8) ; U5.13 42.95,22.125 v4(43.275,21.8) ; R5.1 45.2,73.9 46.8,72.3 46.8,71.7 v1(46.9,71.6) C11.1 ; U5.6 44.25,20.825 v4(43.275,21.8) ; C22.2 49,30.2 49.104,30.304 49.104,31.004 v2(49.2,31.1) ; GND.1@51.3,43.8 GND.1@52.15,42.95 ; GND.1 52.2,42.5 56.88,42.5 H2.5 H2.5@56.695,42.32 ; R4.2 v2(56.25,20.25) v2@56.25,20.352 ; C30.1 55.7,23 55.7,20.902 v2@56.25,20.352 ; C31.1 56.25,21.95 v2@56.25,20.352 ; 59.8,27.8 59.8,29 ; H1.6@62.5,23 H1.6@62.5,25.5 ; H1.6@62.5,27.5 H1.6@62.5,30
  Top Layer w0.8: T1.2 v2(12.65,8.15) ; T2.2 v2(12.65,12.15) ; C34.1 24.85,19 25,19.15 26.15,19.15 v2(26.9,19.9) 26.25,20.55 25,20.55 24.85,20.7 C33.1
  Top Layer w1: v1(12.975,17.7) 16.075,17.7 D1.1 ; C26.1 v1(21,30.4) ; C27.1 v2(21.9,32.5) ; Q4.1@29.4,15.65 30.604,14.446 v2@30.604,13.996
  Bottom Layer w0.3: v2@28.296,38.404 v2(28.348,38.352)
  other v1: 61,10.9 61,19.7 32.6,35.5 41.4,35.5 31.3,73 40.1,73
H_BRIDGE_SLEEP: U1.20 U5.1 | length 56.2
  Top Layer w0.3: v2(22.9,62.8) 23.45,62.25 U1.20 ; v2(38.9,20) 39.9,19 U5.1
  Bottom Layer w0.3: v2(22.9,62.8) 22.3,62.2 22.3,36.607 38.904,20.004 v2(38.9,20)
H_BRIDGE_STAT: U1.29 U5.8 | length 68.1
  Top Layer w0.3: v1(19.3,57.9) 19.45,57.75 U1.29 ; U5.8 45.65,18.9 v1(47,18.9)
  Bottom Layer w0.3: v1(19.3,57.9) 20.9,56.3 20.9,36.939 40.939,16.9 47.824,16.9 48,17.076 48,17.9 v1(47,18.9)
LED_DATA_3V3: LED_DATA_3V3.1 U1.32 U6.4 | length 20.7
  Top Layer w0.3: U6.4 14.45,45.45 LED_DATA_3V3.1 15.302,44.7 20.55,49.948 20.55,52.25 24.55,56.25 U1.32
LED_DATA_5V: LED_CON.2 U6.3 | length 5.5
  Top Layer w0.3: LED_CON.2@4.3,45.46 9.79,45.46 U6.3
LEFT_F: L_F.1 U1.25 U5.16 | length 49.1
  Top Layer w0.3: U1.25 27.724,59.75 27.9,59.574 27.9,56.5 27.6,56.2 27.6,56.053 27.322,55.775 27.175,55.775 23.9,52.5 23.9,39.1 36.3,26.7 37.7,26.7 ; L_F.1 37.7,26.7 ; U5.16 41,25.7 40,26.7 37.7,26.7
LEFT_MOTOR_F: "LEFT MOTOR.2" U5.2 | length 17.8
  Top Layer w0.4: 41.5,17.5 41.6,17.6 41.6,18.95 U5.2
  Top Layer w1: 31.48,5.4 31.5,5.42 31.5,7.2 41.5,17.2 41.5,17.5
LEFT_MOTOR_R: "LEFT MOTOR.1" U5.4 | length 15.2
  Top Layer w0.4: 42.7,17.5 42.9,17.7 42.9,18.95 U5.4
  Top Layer w1: 39.1,5.4 39.1,12.8 42.7,16.4 42.7,17.5
LEFT_R: L_R.1 U1.9 U5.15 | length 55.6
  Top Layer w0.3: U1.9 31.75,64.096 31.6,63.946 31.6,63.393 30.05,61.843 30.05,60.539 28.4,58.889 28.4,56.146 24.5,52.246 24.5,39.4 36.4,27.5 37.7,27.5 ; L_R.1 37.7,27.5 ; U5.15 41.65,25.957 40.207,27.4 40.2,27.4 40.1,27.5 37.7,27.5
MISO: MISO.1 U1.27 U7.7 | length 21.6
  Top Layer w0.3: U7.7 10.386,65.057 10.743,64.7 12.5,64.7 13.9,63.3 MISO.1 16.5,63 18.4,63 19.6,61.8 19.6,60.2 21.05,58.75 U1.27
MOSI: MOSI.1 U1.22 U7.6 | length 25.1
  Top Layer w0.3: U7.6 9.114,68.714 10.1,69.7 11.5,69.7 13.1,68.1 MOSI.1 18.8,68.1 19.4,67.5 19.4,63.907 22.057,61.25 U1.22
NetBAT_2: BAT.2 C33.2 C34.2 F1.1 | length 7.2
  Top Layer w1: C34.2 C33.2 ; F1.1 C34.2@22.2,18.75
  Top Layer w2: BAT.2@22.2,13.7 F1.1
NetC3_2: C3.2 U1.62 Y1.3 | length 12.8
  Top Layer w0.3: U1.62@38.15,62.775 39.075,62.775 39.8,63.5 43.7,63.5 C3.2 43.9,63.5 49,63.5 Y1.3
NetC4_2: C4.2 U1.61 Y1.1 | length 8.8
  Top Layer w0.3: U1.61 39.35,62.25 40.1,63 42.2,63 42.9,62.3 43.7,62.3 C4.2 Y1.1
NetC10_1: C10.1 R5.2 | length 2.5
  Top Layer w0.3: R5.2 44.1,68.8 C10.1
NetC10_2: C10.2 C11.2 L1.1 U1.64 | length 10.9
  Top Layer w0.3: U1.64 37.55,63.775 38.675,63.775 41.7,66.8 L1.1 41.8,67.1 C10.2 C11.2
NetC12_1: C12.1 C13.1 C14.1 C15.1 L1.2 U1.8 U1.12 U1.24 U1.54 | length 43.1
  Top Layer w0.3: C14.1 24.75,60.25 U1.24 v2(28.55,60.25) ; U1.12 30.25,67.85 C13.1 ; C12.1 C13.1 ; v2(30.8,60.1) 30.8,61.886 32.1,63.186 32.1,63.739 32.25,63.889 U1.8 32.25,66.689 31.8,67.139 v1(31.8,67.3) 30.9,67.3 C13.1 ; v2(33.35,58.75) 33.375,58.775 37.293,58.775 37.318,58.75 38.125,58.75 38.15,58.725 38.875,58.725 39.8,57.8 39.8,56.75 40.05,56.5 C15.1 ; v1(39.5,67.4) 39.5,68.8 40.5,69.8 41.5,69.8 L1.2
  Bottom Layer w0.3: v2(28.55,60.25) 28.7,60.1 v2(30.8,60.1) 31.4,60.1 32.75,58.75 v2(33.35,58.75) ; v1(31.8,67.3) 31.9,67.4 v1(39.5,67.4)
NetC18_1: C18.1 U5.11 | length 4.1
  Top Layer w0.3: U5.11 44.25,25.648 45.9,27.298 C18.1
NetC18_2: C18.2 C22.1 H_B_PWR.2 U5.12 | length 7.4
  Top Layer w0.3: U5.12 43.6,26.2 ; H_B_PWR.2 43.8,27.3 C18.2 47.3,29.4 C22.1
  Top Layer w1: 43.6,26.2 H_B_PWR.2
NetC21_2: C21.2 L2.2 U7.1 | length 7.3
  Top Layer w0.3: U7.1 1.8,66.043 C21.2 2.1,64.3 3.3,63.1 L2.2@5.5,63.1
NetC23_1: C23.1 U5.14 | length 3.7
  Top Layer w0.3: C23.1 41.3,27.2 42.3,26.2 U5.14
NetC24_1: C24.1 D1.2 L3.1 U3.8 | length 17.2
  Top Layer w0.3: D1.2@9.4,18.025 D1.2 ; L3.1 L3.1@12.2,26.5
  Top Layer w1: D1.2 9.425,20.334 12.686,23.595 ; L3.1 12.1,24.181 12.686,23.595 ; C24.1 17.3,22 16.689,22.611 U3.8 12.686,23.595
NetC24_2: C24.2 U3.1 | length 2.8
  Top Layer w1: C24.2 20.7,22 21.311,22.611 U3.1
NetERASE_1: ERASE.1 U1.55 | length 9.9
  Top Layer w0.3: 38.3,59.225 39.175,59.225 41.9,56.5 41.9,55 43,53.9 ERASE.1
NetF1_2: F1.2 Q4.3 | length 2.1
  Top Layer w2: F1.2 Q4.3
NetH3_1: H3.1 T2.3 | length 5.3
  Top Layer w0.8: H3.1 6.64,12.26 7.7,11.2 T2.3
NetH4_1: H4.1 T1.3 | length 5.2
  Top Layer w0.8: H4.1 4.04,6.7 7.5,6.7 8,7.2 T1.3
NetR1_2: R1.2 U1.57 | length 6.8
  Top Layer w0.3: U1.57@37.525,60.25 39.624,60.25 39.8,60.074 39.8,60.055 40.005,59.85 40.15,59.85 41.3,58.7 R1.2
NetR2_2: R2.2 U1.56 | length 6.7
  Top Layer w0.3: U1.56@38.15,59.75 39.398,59.75 41.948,57.2 R2.2
NetR6_1: R6.1 STAT_1.2 | length 1.8
  Top Layer w0.3: STAT_1.2 32.8,44.45 R6.1
NetR7_1: R7.1 STAT_2.2 | length 1.8
  Top Layer w0.3: R7.1 31.3,44.5 STAT_2.2
NetR10_1: R10.1 R23.2 U3.3 | length 5.9
  Top Layer w0.3: U3.3 21.346,26.1 23.45,26.1 R10.1 25,27.55 25.15,27.7 R23.2
NetR11_2: R11.2 R14.1 T2.1 | length 4.8
  Top Layer w0.3: T2.1 14.3,10.25 R14.1 R11.2
NetR13_2: R13.2 R15.1 T1.1 | length 3.5
  Top Layer w0.3: T1.1 12.25,6.25 R15.1 12.5,6.2 R13.2
NetR20_1: R20.1 U3.4 | length 1.8
  Top Layer w0.3: U3.4 21.311,27.911 R20.1
nRST: H2.1 nRST.2 U1.39 | length 41.9
  Top Layer w0.3: nRST.2 v1(26.7,48.6) 26.75,48.65 26.836,48.65 31.225,53.039 31.225,54.45 U1.39 ; v2(46.8,48.6) 55.86,48.6 H2.1
  Bottom Layer w0.3: v1(26.7,48.6) v2(46.8,48.6)
RADIO_CE: R12.2 RAD_CE.1 U1.30 U7.3 | length 27.6
  Top Layer w0.3: U7.3 5.3,65.5 6.45,64.35 9.145,64.35 10.495,63 R12.2 10.9,62.2 11.495,62.2 11.7,61.995 11.7,60.7 15,57.4 16.3,57.4 16.8,56.9 20.202,56.9 20.552,57.25 U1.30
RADIO_IRQ: RAD_IRQ.1 U1.26 U7.8 | length 19.8
  Top Layer w0.3: U7.8 12.957,65.7 RAD_IRQ.1 16.3,65.6 18.2,65.6 18.5,65.3 18.5,63.9 20.2,62.2 20.2,60.5 21.1,59.6 21.707,59.6 22.057,59.25 U1.26
RIGHT_F: R_F.1 U1.48 U5.9 | length 44.8
  Top Layer w0.3: U1.48 35.75,53.85 47.6,42 47.6,41.3 ; U5.9 45.55,25.35 46.6,26.4 49.7,26.4 51.3,28 51.3,37.107 47.6,40.807 47.6,41.3 ; R_F.1@51.6,40.6 50.9,41.3 47.6,41.3
RIGHT_MOTOR_F: "RIGHT MOTOR.1" U5.7 | length 17.8
  Top Layer w0.4: U5.7 44.95,18.95 44.95,17.65 45.1,17.5
  Top Layer w1: 45.1,17.5 45.1,17.1 54.9,7.3 54.9,5.52 55.02,5.4
RIGHT_MOTOR_R: "RIGHT MOTOR.2" U5.5 | length 15.4
  Top Layer w0.4: U5.5 43.65,18.95 43.65,17.75 43.9,17.5
  Top Layer w1: 43.9,17.5 43.9,16.3 47.4,12.8 47.4,5.4 47.4,5.22 47.38,5.2
RIGHT_R: R_R.1 U1.47 U5.10 | length 43.7
  Top Layer w0.3: U1.47 35.25,53.233 46.843,41.639 46.843,41.2 ; R_R.1 44.2,41.2 46.843,41.2 ; U5.10 44.9,25.407 46.462,26.97 49.27,26.97 50.6,28.3 50.6,36.9 46.843,40.657 46.843,41.2
SLEEP: SLEEP.2 U1.44 | length 14.7
  Top Layer w0.3: U1.44 33.75,53.25 31.4,50.9 31.4,49.4 32.2,48.6 35.65,48.6 37.5,46.75 SLEEP.2
SPCK: SPCK.1 U1.21 U7.5 | length 28.2
  Top Layer w0.3: U7.5 7.843,69.743 8.6,70.5 SPCK.1 18.6,70.5 20,69.1 20,64.2 22.45,61.75 U1.21
SPI_CSN: SPI_CSN.1 U1.28 U7.4 | length 25.6
  Top Layer w0.3: U7.4 6.571,65.5 7.071,65 9.6,65 10.5,64.1 12.2,64.1 13.074,63.226 13.074,61.426 13.7,60.8 SPI_CSN.1 16.3,60.7 18.2,60.7 20.65,58.25 U1.28 ; SPI_CSN.1@16.2,61.1 SPI_CSN.1@16.3,61.2
STAT0: R6.2 U1.42 | length 10
  Top Layer w0.3: U1.42 32.75,53.15 30.9,51.3 30.9,49.193 32.893,47.2 32.893,46.057 R6.2
STAT1: R7.2 U1.41 | length 9.5
  Top Layer w0.3: R7.2 31.2,48.186 30.4,48.986 30.4,51.507 32.225,53.332 32.225,54.45 U1.41
SWCLK: H2.2 SWCLK.1 U1.53 | length 29.4
  Top Layer w0.3: U1.53 37.55,58.225 38.2,58.225 38.554,58.225 39,57.779 39,54.298 41.394,51.904 44.396,51.904 46.4,49.9 51.3,49.9 58.46,49.9 59.6,48.76 H2.2
SWDIO: H2.4 SWDIO.1 U1.51 | length 30.1
  Top Layer w0.3: U1.51 36.486,57.25 36.4,57.164 36.4,55.998 45.498,46.9 51.3,46.9 55.415,46.9 56.28,46.035 58.425,46.035 H2.4
USB_DETECT: R3.1 R4.1 U1.35 | length 62.6
  Top Layer w0.3: U1.35 v1(29.25,56.75) ; v1(52.6,23.45) 52.7,23.35 53.55,23.35 53.8,23.1 R3.1 54.5,22.05 R4.1
  Bottom Layer w0.3: v1(29.25,56.75) 23.5,51 23.476,51 23.476,37.324 28.6,32.2 33.5,32.2 40.8,24.9 ; 40.2,24.9 51.7,24.9 52.6,24
VBUS: C30.2 C31.2 D3.2 H1.1 R3.2 | length 83.2
  Top Layer w0.381: 57.759,25.059 57.95,25.25 H1.1
  Top Layer w0.8: v2(6.2,17.2) 6.3,17.3 D3.2 ; v1(50.7,14.9) 50.7,25.205 51.795,26.3 53.7,26.3 54.5,25.5 R3.2 54.6,24.5 C30.2 57,24.5 C31.2 57.759,25.059
  Bottom Layer w0.8: v2(6.2,17.2) 7.3,16.1 7.3,5.4 7.9,4.8 15.4,4.8 21.876,11.276 47.076,11.276 v1(50.7,14.9)
pads on no net: H1.4 H2.3 H2.9 H2.10 U1.4 U1.11 U1.13 U1.14 U1.23 U1.31 U1.33 U1.34 U1.36 U1.37 U1.38 U1.40 U1.43 U1.49 U1.50 U1.52 U2.4 U3.6 U4.4 Y1.2 Y1.4

## Polygon pours and split planes (outlines as drawn)
GND on Ground Plane (split plane): 63.49,82.69 63.49,2.589 61.505,0.51 0.51,0.51 0.51,66.8 13,66.8 13,71.9 23.9,71.9 30.1,78.1 30.1,84.49 62.05,84.49
6V on Power Plane (split plane): 45.771,19.654 42.246,16.129 22.2,16.129 22.2,30.917 22.454,31.171 45.771,31.171